# EAGLE board Audio-Sound_Breakout-Panel-v10 (EAGLE 7.4.0), part 1 of 2
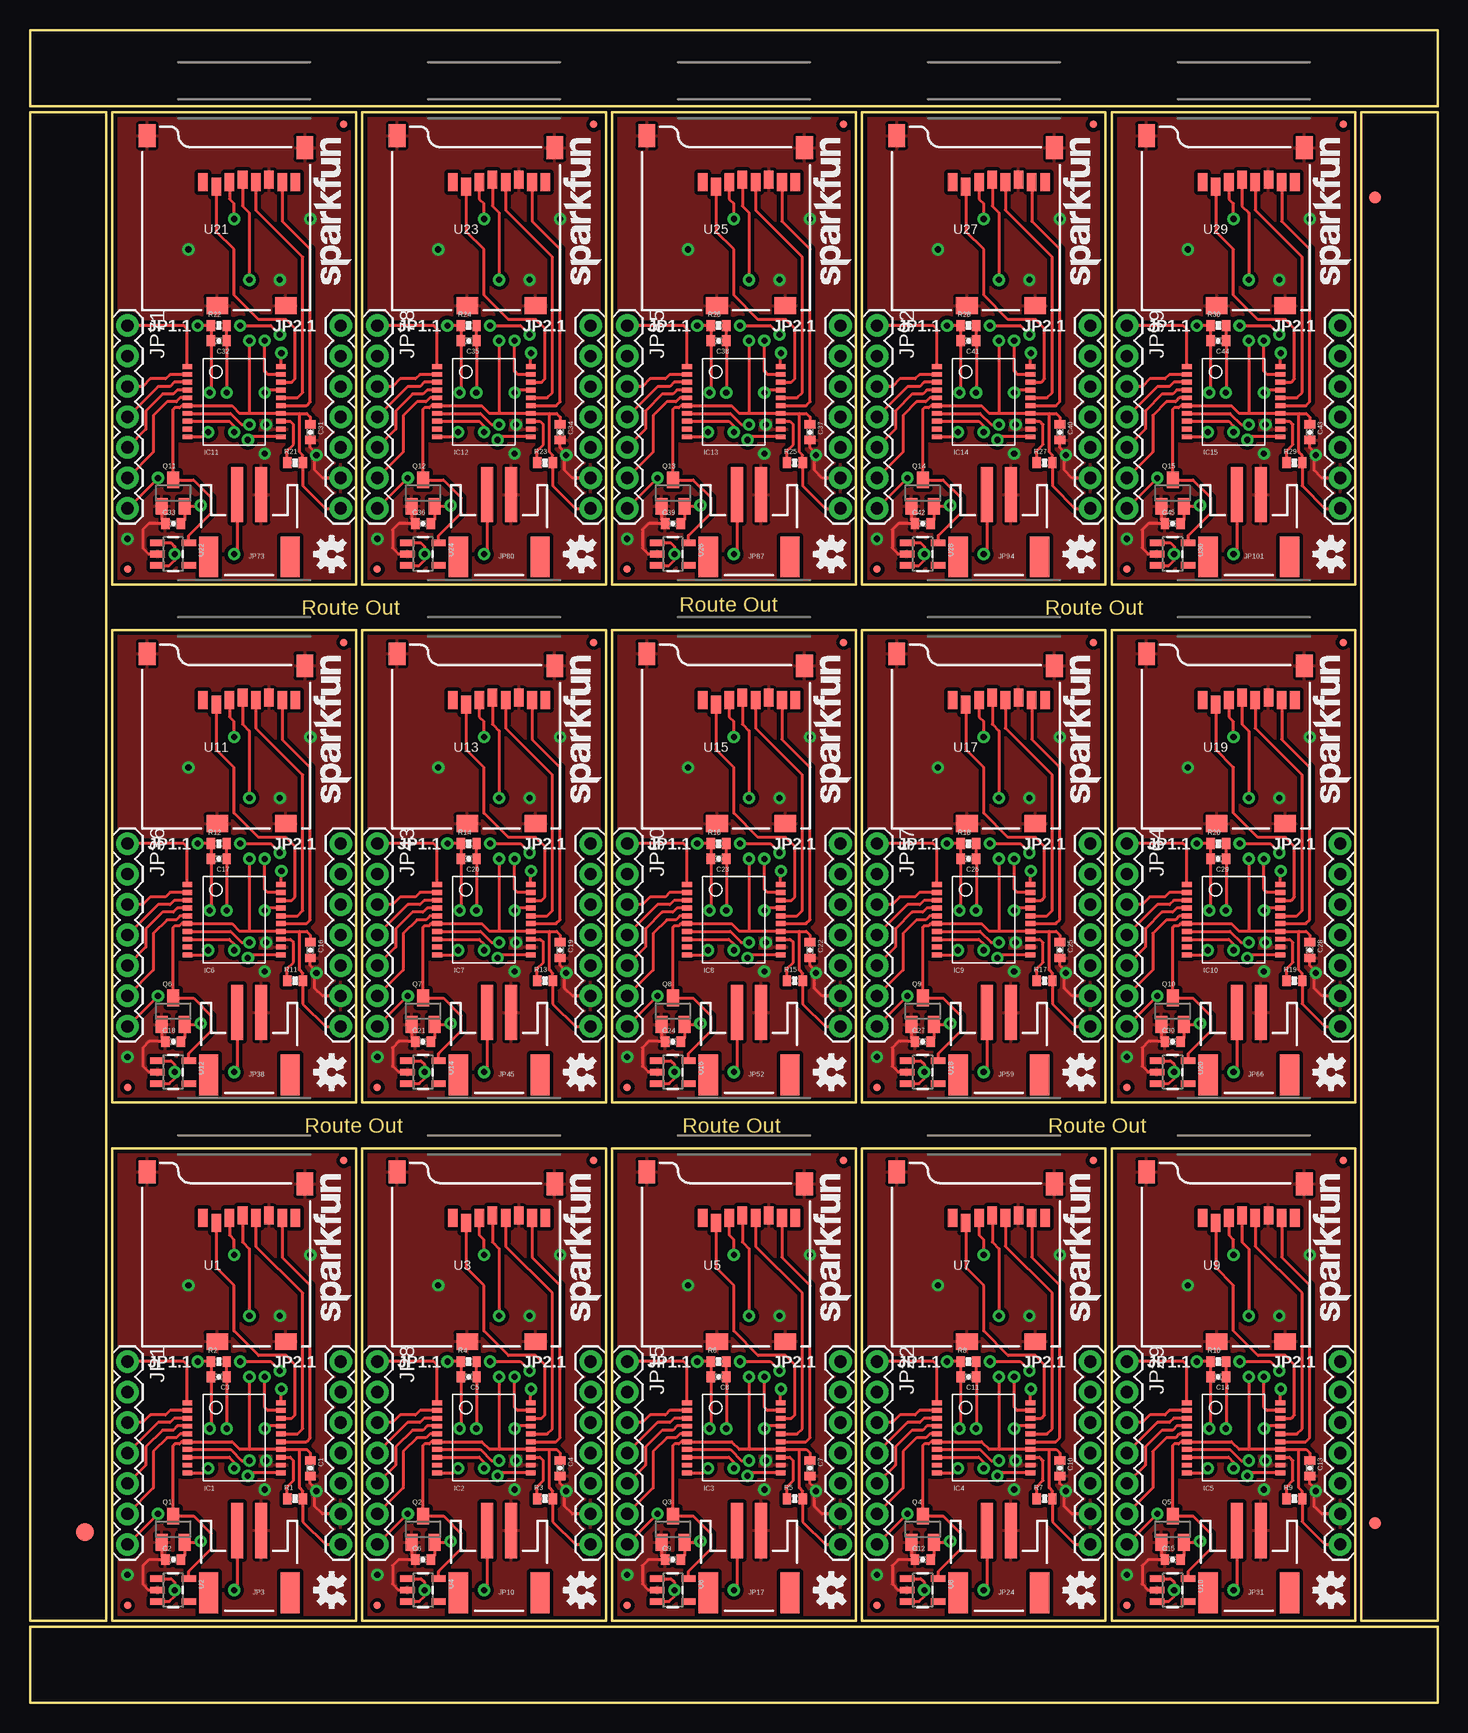
[diagram p0: board, top side]
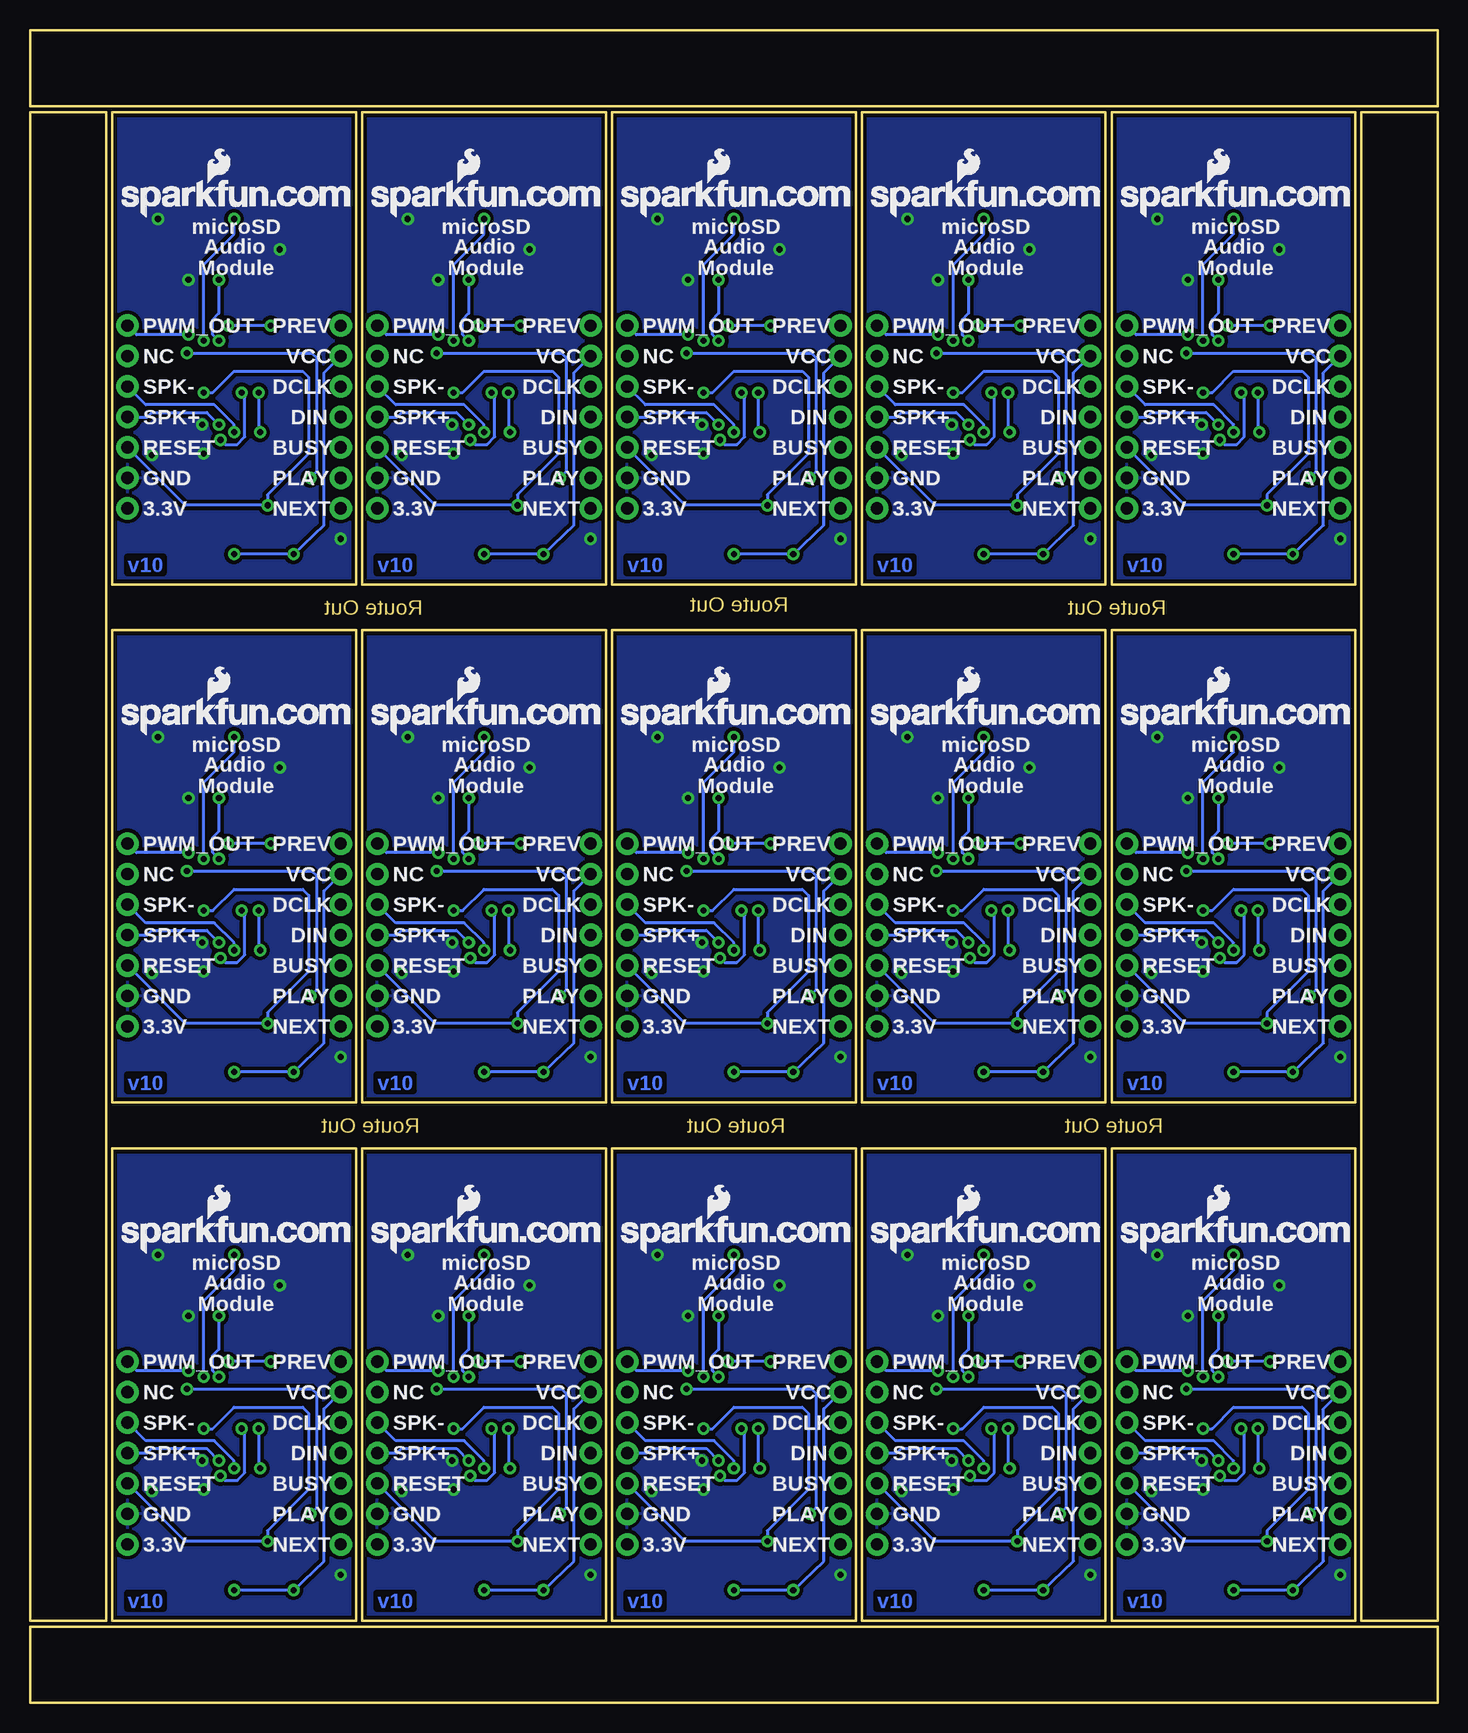
[diagram p1: board, bottom side, seen from below]

Size 117.35 x 139.45 mm. Coordinates in mm from the lower left corner, seen from the top.
Outline: 6.35,79.25 6.35,6.86 0,6.86 0,29.72
Outline: 0,27.18 0,132.59 6.35,132.59 6.35,76.71
Outline: 79.25,0 0,0 0,6.35 29.72,6.35
Outline: 27.18,6.35 117.35,6.35 117.35,0 76.71,0
Outline: 38.1,139.45 117.35,139.45 117.35,133.1 87.63,133.1
Outline: 90.17,133.1 0,133.1 0,139.45 40.64,139.45
Outline: 111,60.2 111,132.59 117.35,132.59 117.35,109.73
Outline: 117.35,112.27 117.35,6.86 111,6.86 111,62.74
Outline: 6.86,6.86 27.18,6.86 27.18,46.23 6.86,46.23 6.86,6.86
Outline: 27.69,6.86 48.01,6.86 48.01,46.23 27.69,46.23 27.69,6.86
Outline: 48.51,6.86 68.83,6.86 68.83,46.23 48.51,46.23 48.51,6.86
Outline: 69.34,6.86 89.66,6.86 89.66,46.23 69.34,46.23 69.34,6.86
Outline: 90.17,6.86 110.49,6.86 110.49,46.23 90.17,46.23 90.17,6.86
Outline: 6.86,50.04 27.18,50.04 27.18,89.41 6.86,89.41 6.86,50.04
Outline: 27.69,50.04 48.01,50.04 48.01,89.41 27.69,89.41 27.69,50.04
Outline: 48.51,50.04 68.83,50.04 68.83,89.41 48.51,89.41 48.51,50.04
Outline: 69.34,50.04 89.66,50.04 89.66,89.41 69.34,89.41 69.34,50.04
Outline: 90.17,50.04 110.49,50.04 110.49,89.41 90.17,89.41 90.17,50.04
Outline: 6.86,93.22 27.18,93.22 27.18,132.59 6.86,132.59 6.86,93.22
Outline: 27.69,93.22 48.01,93.22 48.01,132.59 27.69,132.59 27.69,93.22
Outline: 48.51,93.22 68.83,93.22 68.83,132.59 48.51,132.59 48.51,93.22
Outline: 69.34,93.22 89.66,93.22 89.66,132.59 69.34,132.59 69.34,93.22
Outline: 90.17,93.22 110.49,93.22 110.49,132.59 90.17,132.59 90.17,93.22
Copper layers (1*16): Top 0.035mm / dielectric 1.5mm / Bottom 0.035mm
Design rules "default": minimum track width 8mil, minimum drill 20mil, track to track 8mil, track to pad 8mil, pad to pad 8mil, via to via 8mil, smd to smd 8mil, copper to edge 8mil, drill to drill 8mil, minimum pad ring 12mil, minimum via ring 10mil, stop-mask expansion 4mil, vias tented up to drill 20mil, thermal gap 10mil

## Footprints (pad centres in the part's own frame; a part is rotated, then mirrored left to right if it is on the bottom)
0402-CAP = smd 0.7 x 0.9: 1 -0.65,0; 2 0.65,0
FIDUCIAL-1.5X3 = smd 1.5 x 1.5: 1 0,0
FIDUCIAL-1X2 = smd 1 x 1: 1 0,0
SSOP_20 = smd 0.813 x 0.406: 1 -3.9,2.925; 2 -3.9,2.275; 3 -3.9,1.625; 4 -3.9,0.975; 5 -3.9,0.325; 6 -3.9,-0.325; 7 -3.9,-0.975; 8 -3.9,-1.625; 9 -3.9,-2.275; 10 -3.9,-2.925; 11 3.9,-2.925; 12 3.9,-2.275; 13 3.9,-1.625; 14 3.9,-0.975; 15 3.9,-0.325; 16 3.9,0.325; 17 3.9,0.975; 18 3.9,1.625; 19 3.9,2.275; 20 3.9,2.925
1X07 = drill 1.016 pad 1.88: 1 0,0; 2 2.54,0; 3 5.08,0; 4 7.62,0; 5 10.16,0; 6 12.7,0; 7 15.24,0
JST-2-SMD = smd 1 x 4.6: 1 -1,-3.7; 2 1,-3.7 | smd 1.6 x 3.4: NC1 -3.4,1.5; NC2 3.4,1.5
MICRO-FIDUCIAL = smd 0.635 x 0.635: 1 0,0
SOT23 = smd 1 x 1.4: 1 -0.95,-1.1; 2 0.95,-1.1; 3 0,1.1
0402-RES = smd 0.7 x 0.9: 1 -0.65,0; 2 0.65,0
MICRO-SD-SOCKET-PP = smd 0.8 x 1.5: 1 -8.94,10.7; 2 -7.84,10.3; 3 -6.74,10.7; 4 -5.64,10.9; 5 -4.54,10.7; 6 -3.44,10.9; 7 -2.34,10.7; 8 -1.24,10.7 | smd 1.8 x 1.4: CD1 -2.05,0.4; CD2 -7.75,0.4 | smd 1.4 x 1.9: GND1 -13.6,14.55; GND3 -0.45,13.55
SOT23-5 = smd 0.55 x 1.2: 1 -0.95,-1.3; 2 0,-1.3; 3 0.95,-1.3; 4 0.95,1.3; 5 -0.95,1.3

## Placement (x,y rotation side)
C1  100nF  [0402-CAP]  23.37,19.56 270 top
C2  100nF  [0402-CAP]  11.94,11.94 0 top
C3  1nF  [0402-CAP]  15.75,27.18 180 top
C4  100nF  [0402-CAP]  44.2,19.56 270 top
C5  1nF  [0402-CAP]  36.58,27.18 180 top
C6  100nF  [0402-CAP]  32.77,11.94 0 top
C7  100nF  [0402-CAP]  65.02,19.56 270 top
C8  1nF  [0402-CAP]  57.4,27.18 180 top
C9  100nF  [0402-CAP]  53.59,11.94 0 top
C10  100nF  [0402-CAP]  85.85,19.56 270 top
C11  1nF  [0402-CAP]  78.23,27.18 180 top
C12  100nF  [0402-CAP]  74.42,11.94 0 top
C13  100nF  [0402-CAP]  106.68,19.56 270 top
C14  1nF  [0402-CAP]  99.06,27.18 180 top
C15  100nF  [0402-CAP]  95.25,11.94 0 top
C16  100nF  [0402-CAP]  23.37,62.74 270 top
C17  1nF  [0402-CAP]  15.75,70.36 180 top
C18  100nF  [0402-CAP]  11.94,55.12 0 top
C19  100nF  [0402-CAP]  44.2,62.74 270 top
C20  1nF  [0402-CAP]  36.58,70.36 180 top
C21  100nF  [0402-CAP]  32.77,55.12 0 top
C22  100nF  [0402-CAP]  65.02,62.74 270 top
C23  1nF  [0402-CAP]  57.4,70.36 180 top
C24  100nF  [0402-CAP]  53.59,55.12 0 top
C25  100nF  [0402-CAP]  85.85,62.74 270 top
C26  1nF  [0402-CAP]  78.23,70.36 180 top
C27  100nF  [0402-CAP]  74.42,55.12 0 top
C28  100nF  [0402-CAP]  106.68,62.74 270 top
C29  1nF  [0402-CAP]  99.06,70.36 180 top
C30  100nF  [0402-CAP]  95.25,55.12 0 top
C31  100nF  [0402-CAP]  23.37,105.92 270 top
C32  1nF  [0402-CAP]  15.75,113.54 180 top
C33  100nF  [0402-CAP]  11.94,98.3 0 top
C34  100nF  [0402-CAP]  44.2,105.92 270 top
C35  1nF  [0402-CAP]  36.58,113.54 180 top
C36  100nF  [0402-CAP]  32.77,98.3 0 top
C37  100nF  [0402-CAP]  65.02,105.92 270 top
C38  1nF  [0402-CAP]  57.4,113.54 180 top
C39  100nF  [0402-CAP]  53.59,98.3 0 top
C40  100nF  [0402-CAP]  85.85,105.92 270 top
C41  1nF  [0402-CAP]  78.23,113.54 180 top
C42  100nF  [0402-CAP]  74.42,98.3 0 top
C43  100nF  [0402-CAP]  106.68,105.92 270 top
C44  1nF  [0402-CAP]  99.06,113.54 180 top
C45  100nF  [0402-CAP]  95.25,98.3 0 top
E$1  [FIDUCIAL-1.5X3]  4.57,14.22 0 top
E$7  [FIDUCIAL-1X2]  112.14,125.48 180 top
E$8  [FIDUCIAL-1X2]  112.14,14.99 0 top
IC1  WTV020SD-20S  [SSOP_20]  17.02,22.1 0 top
IC2  WTV020SD-20S  [SSOP_20]  37.85,22.1 0 top
IC3  WTV020SD-20S  [SSOP_20]  58.67,22.1 0 top
IC4  WTV020SD-20S  [SSOP_20]  79.5,22.1 0 top
IC5  WTV020SD-20S  [SSOP_20]  100.33,22.1 0 top
IC6  WTV020SD-20S  [SSOP_20]  17.02,65.28 0 top
IC7  WTV020SD-20S  [SSOP_20]  37.85,65.28 0 top
IC8  WTV020SD-20S  [SSOP_20]  58.67,65.28 0 top
IC9  WTV020SD-20S  [SSOP_20]  79.5,65.28 0 top
IC10  WTV020SD-20S  [SSOP_20]  100.33,65.28 0 top
IC11  WTV020SD-20S  [SSOP_20]  17.02,108.46 0 top
IC12  WTV020SD-20S  [SSOP_20]  37.85,108.46 0 top
IC13  WTV020SD-20S  [SSOP_20]  58.67,108.46 0 top
IC14  WTV020SD-20S  [SSOP_20]  79.5,108.46 0 top
IC15  WTV020SD-20S  [SSOP_20]  100.33,108.46 0 top
JP1  [1X07]  8.13,28.45 270 top
JP2  [1X07]  25.91,28.45 270 top
JP3  [JST-2-SMD]  18.29,10.67 180 top
JP4  LOGO-SFENW2  [SFE-NEW-WEB]  26.8,31.88 90 top
JP5  LOGO-SFENEW  [SFE-NEW-WEBLOGO]  26.42,37.47 0 bottom
JP6  FIDUCIALUFIDUCIAL  [MICRO-FIDUCIAL]  8.13,8.13 0 top
JP7  FIDUCIALUFIDUCIAL  [MICRO-FIDUCIAL]  26.16,45.21 0 top
JP8  [1X07]  28.96,28.45 270 top
JP9  [1X07]  46.74,28.45 270 top
JP10  [JST-2-SMD]  39.12,10.67 180 top
JP11  LOGO-SFENW2  [SFE-NEW-WEB]  47.62,31.88 90 top
JP12  LOGO-SFENEW  [SFE-NEW-WEBLOGO]  47.24,37.47 0 bottom
JP13  FIDUCIALUFIDUCIAL  [MICRO-FIDUCIAL]  28.96,8.13 0 top
JP14  FIDUCIALUFIDUCIAL  [MICRO-FIDUCIAL]  46.99,45.21 0 top
JP15  [1X07]  49.78,28.45 270 top
JP16  [1X07]  67.56,28.45 270 top
JP17  [JST-2-SMD]  59.94,10.67 180 top
JP18  LOGO-SFENW2  [SFE-NEW-WEB]  68.45,31.88 90 top
JP19  LOGO-SFENEW  [SFE-NEW-WEBLOGO]  68.07,37.47 0 bottom
JP20  FIDUCIALUFIDUCIAL  [MICRO-FIDUCIAL]  49.78,8.13 0 top
JP21  FIDUCIALUFIDUCIAL  [MICRO-FIDUCIAL]  67.82,45.21 0 top
JP22  [1X07]  70.61,28.45 270 top
JP23  [1X07]  88.39,28.45 270 top
JP24  [JST-2-SMD]  80.77,10.67 180 top
JP25  LOGO-SFENW2  [SFE-NEW-WEB]  89.28,31.88 90 top
JP26  LOGO-SFENEW  [SFE-NEW-WEBLOGO]  88.9,37.47 0 bottom
JP27  FIDUCIALUFIDUCIAL  [MICRO-FIDUCIAL]  70.61,8.13 0 top
JP28  FIDUCIALUFIDUCIAL  [MICRO-FIDUCIAL]  88.65,45.21 0 top
JP29  [1X07]  91.44,28.45 270 top
JP30  [1X07]  109.22,28.45 270 top
JP31  [JST-2-SMD]  101.6,10.67 180 top
JP32  LOGO-SFENW2  [SFE-NEW-WEB]  110.11,31.88 90 top
JP33  LOGO-SFENEW  [SFE-NEW-WEBLOGO]  109.73,37.47 0 bottom
JP34  FIDUCIALUFIDUCIAL  [MICRO-FIDUCIAL]  91.44,8.13 0 top
JP35  FIDUCIALUFIDUCIAL  [MICRO-FIDUCIAL]  109.47,45.21 0 top
JP36  [1X07]  8.13,71.63 270 top
JP37  [1X07]  25.91,71.63 270 top
JP38  [JST-2-SMD]  18.29,53.85 180 top
JP39  LOGO-SFENW2  [SFE-NEW-WEB]  26.8,75.06 90 top
JP40  LOGO-SFENEW  [SFE-NEW-WEBLOGO]  26.42,80.64 0 bottom
JP41  FIDUCIALUFIDUCIAL  [MICRO-FIDUCIAL]  8.13,51.31 0 top
JP42  FIDUCIALUFIDUCIAL  [MICRO-FIDUCIAL]  26.16,88.39 0 top
JP43  [1X07]  28.96,71.63 270 top
JP44  [1X07]  46.74,71.63 270 top
JP45  [JST-2-SMD]  39.12,53.85 180 top
JP46  LOGO-SFENW2  [SFE-NEW-WEB]  47.62,75.06 90 top
JP47  LOGO-SFENEW  [SFE-NEW-WEBLOGO]  47.24,80.64 0 bottom
JP48  FIDUCIALUFIDUCIAL  [MICRO-FIDUCIAL]  28.96,51.31 0 top
JP49  FIDUCIALUFIDUCIAL  [MICRO-FIDUCIAL]  46.99,88.39 0 top
JP50  [1X07]  49.78,71.63 270 top
JP51  [1X07]  67.56,71.63 270 top
JP52  [JST-2-SMD]  59.94,53.85 180 top
JP53  LOGO-SFENW2  [SFE-NEW-WEB]  68.45,75.06 90 top
JP54  LOGO-SFENEW  [SFE-NEW-WEBLOGO]  68.07,80.64 0 bottom
JP55  FIDUCIALUFIDUCIAL  [MICRO-FIDUCIAL]  49.78,51.31 0 top
JP56  FIDUCIALUFIDUCIAL  [MICRO-FIDUCIAL]  67.82,88.39 0 top
JP57  [1X07]  70.61,71.63 270 top
JP58  [1X07]  88.39,71.63 270 top
JP59  [JST-2-SMD]  80.77,53.85 180 top
JP60  LOGO-SFENW2  [SFE-NEW-WEB]  89.28,75.06 90 top
JP61  LOGO-SFENEW  [SFE-NEW-WEBLOGO]  88.9,80.64 0 bottom
JP62  FIDUCIALUFIDUCIAL  [MICRO-FIDUCIAL]  70.61,51.31 0 top
JP63  FIDUCIALUFIDUCIAL  [MICRO-FIDUCIAL]  88.65,88.39 0 top
JP64  [1X07]  91.44,71.63 270 top
JP65  [1X07]  109.22,71.63 270 top
JP66  [JST-2-SMD]  101.6,53.85 180 top
JP67  LOGO-SFENW2  [SFE-NEW-WEB]  110.11,75.06 90 top
JP68  LOGO-SFENEW  [SFE-NEW-WEBLOGO]  109.73,80.64 0 bottom
JP69  FIDUCIALUFIDUCIAL  [MICRO-FIDUCIAL]  91.44,51.31 0 top
JP70  FIDUCIALUFIDUCIAL  [MICRO-FIDUCIAL]  109.47,88.39 0 top
JP71  [1X07]  8.13,114.81 270 top
JP72  [1X07]  25.91,114.81 270 top
JP73  [JST-2-SMD]  18.29,97.03 180 top
JP74  LOGO-SFENW2  [SFE-NEW-WEB]  26.8,118.24 90 top
JP75  LOGO-SFENEW  [SFE-NEW-WEBLOGO]  26.42,123.83 0 bottom
JP76  FIDUCIALUFIDUCIAL  [MICRO-FIDUCIAL]  8.13,94.49 0 top
JP77  FIDUCIALUFIDUCIAL  [MICRO-FIDUCIAL]  26.16,131.57 0 top
JP78  [1X07]  28.96,114.81 270 top
JP79  [1X07]  46.74,114.81 270 top
JP80  [JST-2-SMD]  39.12,97.03 180 top
JP81  LOGO-SFENW2  [SFE-NEW-WEB]  47.62,118.24 90 top
JP82  LOGO-SFENEW  [SFE-NEW-WEBLOGO]  47.24,123.83 0 bottom
JP83  FIDUCIALUFIDUCIAL  [MICRO-FIDUCIAL]  28.96,94.49 0 top
JP84  FIDUCIALUFIDUCIAL  [MICRO-FIDUCIAL]  46.99,131.57 0 top
JP85  [1X07]  49.78,114.81 270 top
JP86  [1X07]  67.56,114.81 270 top
JP87  [JST-2-SMD]  59.94,97.03 180 top
JP88  LOGO-SFENW2  [SFE-NEW-WEB]  68.45,118.24 90 top
JP89  LOGO-SFENEW  [SFE-NEW-WEBLOGO]  68.07,123.83 0 bottom
JP90  FIDUCIALUFIDUCIAL  [MICRO-FIDUCIAL]  49.78,94.49 0 top
JP91  FIDUCIALUFIDUCIAL  [MICRO-FIDUCIAL]  67.82,131.57 0 top
JP92  [1X07]  70.61,114.81 270 top
JP93  [1X07]  88.39,114.81 270 top
JP94  [JST-2-SMD]  80.77,97.03 180 top
JP95  LOGO-SFENW2  [SFE-NEW-WEB]  89.28,118.24 90 top
JP96  LOGO-SFENEW  [SFE-NEW-WEBLOGO]  88.9,123.83 0 bottom
JP97  FIDUCIALUFIDUCIAL  [MICRO-FIDUCIAL]  70.61,94.49 0 top
JP98  FIDUCIALUFIDUCIAL  [MICRO-FIDUCIAL]  88.65,131.57 0 top
JP99  [1X07]  91.44,114.81 270 top
JP100  [1X07]  109.22,114.81 270 top
JP101  [JST-2-SMD]  101.6,97.03 180 top
JP102  LOGO-SFENW2  [SFE-NEW-WEB]  110.11,118.24 90 top
JP103  LOGO-SFENEW  [SFE-NEW-WEBLOGO]  109.73,123.83 0 bottom
JP104  FIDUCIALUFIDUCIAL  [MICRO-FIDUCIAL]  91.44,94.49 0 top
JP105  FIDUCIALUFIDUCIAL  [MICRO-FIDUCIAL]  109.47,131.57 0 top
Q1  MMBT2222A  [SOT23]  11.94,14.48 0 top
Q2  MMBT2222A  [SOT23]  32.77,14.48 0 top
Q3  MMBT2222A  [SOT23]  53.59,14.48 0 top
Q4  MMBT2222A  [SOT23]  74.42,14.48 0 top
Q5  MMBT2222A  [SOT23]  95.25,14.48 0 top
Q6  MMBT2222A  [SOT23]  11.94,57.66 0 top
Q7  MMBT2222A  [SOT23]  32.77,57.66 0 top
Q8  MMBT2222A  [SOT23]  53.59,57.66 0 top
Q9  MMBT2222A  [SOT23]  74.42,57.66 0 top
Q10  MMBT2222A  [SOT23]  95.25,57.66 0 top
Q11  MMBT2222A  [SOT23]  11.94,100.84 0 top
Q12  MMBT2222A  [SOT23]  32.77,100.84 0 top
Q13  MMBT2222A  [SOT23]  53.59,100.84 0 top
Q14  MMBT2222A  [SOT23]  74.42,100.84 0 top
Q15  MMBT2222A  [SOT23]  95.25,100.84 0 top
R1  150  [0402-RES]  22.1,17.02 0 top
R2  15k  [0402-RES]  15.75,28.45 0 top
R3  150  [0402-RES]  42.93,17.02 0 top
R4  15k  [0402-RES]  36.58,28.45 0 top
R5  150  [0402-RES]  63.75,17.02 0 top
R6  15k  [0402-RES]  57.4,28.45 0 top
R7  150  [0402-RES]  84.58,17.02 0 top
R8  15k  [0402-RES]  78.23,28.45 0 top
R9  150  [0402-RES]  105.41,17.02 0 top
R10  15k  [0402-RES]  99.06,28.45 0 top
R11  150  [0402-RES]  22.1,60.2 0 top
R12  15k  [0402-RES]  15.75,71.63 0 top
R13  150  [0402-RES]  42.93,60.2 0 top
R14  15k  [0402-RES]  36.58,71.63 0 top
R15  150  [0402-RES]  63.75,60.2 0 top
R16  15k  [0402-RES]  57.4,71.63 0 top
R17  150  [0402-RES]  84.58,60.2 0 top
R18  15k  [0402-RES]  78.23,71.63 0 top
R19  150  [0402-RES]  105.41,60.2 0 top
R20  15k  [0402-RES]  99.06,71.63 0 top
R21  150  [0402-RES]  22.1,103.38 0 top
R22  15k  [0402-RES]  15.75,114.81 0 top
R23  150  [0402-RES]  42.93,103.38 0 top
R24  15k  [0402-RES]  36.58,114.81 0 top
R25  150  [0402-RES]  63.75,103.38 0 top
R26  15k  [0402-RES]  57.4,114.81 0 top
R27  150  [0402-RES]  84.58,103.38 0 top
R28  15k  [0402-RES]  78.23,114.81 0 top
R29  150  [0402-RES]  105.41,103.38 0 top
R30  15k  [0402-RES]  99.06,114.81 0 top
U1  microSD socket  [MICRO-SD-SOCKET-PP]  23.37,29.72 0 top
U2  MIC5219-3.3YM5  [SOT23-5]  11.94,9.4 270 top
U3  microSD socket  [MICRO-SD-SOCKET-PP]  44.2,29.72 0 top
U4  MIC5219-3.3YM5  [SOT23-5]  32.77,9.4 270 top
U5  microSD socket  [MICRO-SD-SOCKET-PP]  65.02,29.72 0 top
U6  MIC5219-3.3YM5  [SOT23-5]  53.59,9.4 270 top
U7  microSD socket  [MICRO-SD-SOCKET-PP]  85.85,29.72 0 top
U8  MIC5219-3.3YM5  [SOT23-5]  74.42,9.4 270 top
U9  microSD socket  [MICRO-SD-SOCKET-PP]  106.68,29.72 0 top
U10  MIC5219-3.3YM5  [SOT23-5]  95.25,9.4 270 top
U11  microSD socket  [MICRO-SD-SOCKET-PP]  23.37,72.9 0 top
U12  MIC5219-3.3YM5  [SOT23-5]  11.94,52.58 270 top
U13  microSD socket  [MICRO-SD-SOCKET-PP]  44.2,72.9 0 top
U14  MIC5219-3.3YM5  [SOT23-5]  32.77,52.58 270 top
U15  microSD socket  [MICRO-SD-SOCKET-PP]  65.02,72.9 0 top
U16  MIC5219-3.3YM5  [SOT23-5]  53.59,52.58 270 top
U17  microSD socket  [MICRO-SD-SOCKET-PP]  85.85,72.9 0 top
U18  MIC5219-3.3YM5  [SOT23-5]  74.42,52.58 270 top
U19  microSD socket  [MICRO-SD-SOCKET-PP]  106.68,72.9 0 top
U20  MIC5219-3.3YM5  [SOT23-5]  95.25,52.58 270 top
U21  microSD socket  [MICRO-SD-SOCKET-PP]  23.37,116.08 0 top
U22  MIC5219-3.3YM5  [SOT23-5]  11.94,95.76 270 top
U23  microSD socket  [MICRO-SD-SOCKET-PP]  44.2,116.08 0 top
U24  MIC5219-3.3YM5  [SOT23-5]  32.77,95.76 270 top
U25  microSD socket  [MICRO-SD-SOCKET-PP]  65.02,116.08 0 top
U26  MIC5219-3.3YM5  [SOT23-5]  53.59,95.76 270 top
U27  microSD socket  [MICRO-SD-SOCKET-PP]  85.85,116.08 0 top
U28  MIC5219-3.3YM5  [SOT23-5]  74.42,95.76 270 top
U29  microSD socket  [MICRO-SD-SOCKET-PP]  106.68,116.08 0 top
U30  MIC5219-3.3YM5  [SOT23-5]  95.25,95.76 270 top
U$1  OSHW-LOGOS  [OSHW-LOGO-S]  25.15,9.4 90 top
U$2  OSHW-LOGOS  [OSHW-LOGO-S]  45.97,9.4 90 top
U$3  OSHW-LOGOS  [OSHW-LOGO-S]  66.8,9.4 90 top
U$4  OSHW-LOGOS  [OSHW-LOGO-S]  87.63,9.4 90 top
U$5  OSHW-LOGOS  [OSHW-LOGO-S]  108.46,9.4 90 top
U$6  OSHW-LOGOS  [OSHW-LOGO-S]  25.15,52.58 90 top
U$7  OSHW-LOGOS  [OSHW-LOGO-S]  45.97,52.58 90 top
U$8  OSHW-LOGOS  [OSHW-LOGO-S]  66.8,52.58 90 top
U$9  OSHW-LOGOS  [OSHW-LOGO-S]  87.63,52.58 90 top
U$10  OSHW-LOGOS  [OSHW-LOGO-S]  108.46,52.58 90 top
U$11  OSHW-LOGOS  [OSHW-LOGO-S]  25.15,95.76 90 top
U$12  OSHW-LOGOS  [OSHW-LOGO-S]  45.97,95.76 90 top
U$13  OSHW-LOGOS  [OSHW-LOGO-S]  66.8,95.76 90 top
U$14  OSHW-LOGOS  [OSHW-LOGO-S]  87.63,95.76 90 top
U$15  OSHW-LOGOS  [OSHW-LOGO-S]  108.46,95.76 90 top

## Library data of the parts
C1 C4 C7 C10 C13 C16 C19 C22 C25 C28 C31 C34 C37 C40 C43 = SparkFun-Passives; PROD_ID: CAP-00810
C2 C6 C9 C12 C15 C18 C21 C24 C27 C30 C33 C36 C39 C42 C45 = SparkFun-Passives; MFG: Multiple; PROD_#: CAP-00810; SKU: NA; SPARKLE_ID: 918
C3 C5 C8 C11 C14 C17 C20 C23 C26 C29 C32 C35 C38 C41 C44 = SparkFun-Passives; PROD_ID: CAP-07886
E$1 = SparkFun-Retired
E$7 E$8 JP4 JP5 JP11 JP12 JP18 JP19 JP25 JP26 JP32 JP33 JP39 JP40 JP46 JP47 JP53 JP54 JP60 JP61 JP67 JP68 JP74 JP75 JP81 JP82 JP88 JP89 JP95 JP96 JP102 JP103 U$1-U$15 = SparkFun-Aesthetics
IC1-IC15 = SparkFun-DigitalIC; PROD_#: NA; PROD_ID: IC-11012; SKU: NA; SPARKLE_ID: 6000
JP1 JP2 JP8 JP9 JP15 JP16 JP22 JP23 JP29 JP30 JP36 JP37 JP43 JP44 JP50 JP51 JP57 JP58 JP64 JP65 JP71 JP72 JP78 JP79 JP85 JP86 JP92 JP93 JP99 JP100 = SparkFun-Connectors
JP3 JP10 JP17 JP24 JP31 JP38 JP45 JP52 JP59 JP66 JP73 JP80 JP87 JP94 JP101 = SparkFun-Connectors; PROD_ID: CONN-08352
JP6 JP7 JP13 JP14 JP20 JP21 JP27 JP28 JP34 JP35 JP41 JP42 JP48 JP49 JP55 JP56 JP62 JP63 JP69 JP70 JP76 JP77 JP83 JP84 JP90 JP91 JP97 JP98 JP104 JP105 = SparkFun
Q1-Q15 = SparkFun-DiscreteSemi; PROD_ID: TRANS-08049
R1 R3 R5 R7 R9 R11 R13 R15 R17 R19 R21 R23 R25 R27 R29 = SparkFun-Passives; PROD_ID: RES-11028
R2 R4 R6 R8 R10 R12 R14 R16 R18 R20 R22 R24 R26 R28 R30 = SparkFun-Passives; PROD_ID: RES-07854
U1 U3 U5 U7 U9 U11 U13 U15 U17 U19 U21 U23 U25 U27 U29 = SparkFun-Connectors; PROD_ID: CONN-07820
U2 U4 U6 U8 U10 U12 U14 U16 U18 U20 U22 U24 U26 U28 U30 = SparkFun-PowerIC; PROD_ID: VREG-09872

## Nets
3.3V: C1.1 IC1.6 IC1.14 JP2.7 Q1.3 R1.2 U1.4 U2.5
3.3V1: C4.1 IC2.6 IC2.14 JP9.7 Q2.3 R3.2 U3.4 U4.5
3.3V2: C7.1 IC3.6 IC3.14 JP16.7 Q3.3 R5.2 U5.4 U6.5
3.3V3: C10.1 IC4.6 IC4.14 JP23.7 Q4.3 R7.2 U7.4 U8.5
3.3V4: C13.1 IC5.6 IC5.14 JP30.7 Q5.3 R9.2 U9.4 U10.5
3.3V5: C16.1 IC6.6 IC6.14 JP37.7 Q6.3 R11.2 U11.4 U12.5
3.3V6: C19.1 IC7.6 IC7.14 JP44.7 Q7.3 R13.2 U13.4 U14.5
3.3V7: C22.1 IC8.6 IC8.14 JP51.7 Q8.3 R15.2 U15.4 U16.5
3.3V8: C25.1 IC9.6 IC9.14 JP58.7 Q9.3 R17.2 U17.4 U18.5
3.3V9: C28.1 IC10.6 IC10.14 JP65.7 Q10.3 R19.2 U19.4 U20.5
3.3V10: C31.1 IC11.6 IC11.14 JP72.7 Q11.3 R21.2 U21.4 U22.5
3.3V11: C34.1 IC12.6 IC12.14 JP79.7 Q12.3 R23.2 U23.4 U24.5
3.3V12: C37.1 IC13.6 IC13.14 JP86.7 Q13.3 R25.2 U25.4 U26.5
3.3V13: C40.1 IC14.6 IC14.14 JP93.7 Q14.3 R27.2 U27.4 U28.5
3.3V14: C43.1 IC15.6 IC15.14 JP100.7 Q15.3 R29.2 U29.4 U30.5
BUSY: IC1.4 JP1.5
BUSY1: IC2.4 JP8.5
BUSY2: IC3.4 JP15.5
BUSY3: IC4.4 JP22.5
BUSY4: IC5.4 JP29.5
BUSY5: IC6.4 JP36.5
BUSY6: IC7.4 JP43.5
BUSY7: IC8.4 JP50.5
BUSY8: IC9.4 JP57.5
BUSY9: IC10.4 JP64.5
BUSY10: IC11.4 JP71.5
BUSY11: IC12.4 JP78.5
BUSY12: IC13.4 JP85.5
BUSY13: IC14.4 JP92.5
BUSY14: IC15.4 JP99.5
DCLK: IC1.2 JP1.3
DCLK1: IC2.2 JP8.3
DCLK2: IC3.2 JP15.3
DCLK3: IC4.2 JP22.3
DCLK4: IC5.2 JP29.3
DCLK5: IC6.2 JP36.3
DCLK6: IC7.2 JP43.3
DCLK7: IC8.2 JP50.3
DCLK8: IC9.2 JP57.3
DCLK9: IC10.2 JP64.3
DCLK10: IC11.2 JP71.3
DCLK11: IC12.2 JP78.3
DCLK12: IC13.2 JP85.3
DCLK13: IC14.2 JP92.3
DCLK14: IC15.2 JP99.3
DIN: IC1.3 JP1.4
DIN1: IC2.3 JP8.4
DIN2: IC3.3 JP15.4
DIN3: IC4.3 JP22.4
DIN4: IC5.3 JP29.4
DIN5: IC6.3 JP36.4
DIN6: IC7.3 JP43.4
DIN7: IC8.3 JP50.4
DIN8: IC9.3 JP57.4
DIN9: IC10.3 JP64.4
DIN10: IC11.3 JP71.4
DIN11: IC12.3 JP78.4
DIN12: IC13.3 JP85.4
DIN13: IC14.3 JP92.4
DIN14: IC15.3 JP99.4
GND: C1.2 C2.1 IC1.12 JP2.6 JP3.1 Q1.1 U1.6 U1.CD1 U1.CD2 U1.GND1 U1.GND3 U2.2
GND1: C4.2 C6.1 IC2.12 JP9.6 JP10.1 Q2.1 U3.6 U3.CD1 U3.CD2 U3.GND1 U3.GND3 U4.2
GND2: C7.2 C9.1 IC3.12 JP16.6 JP17.1 Q3.1 U5.6 U5.CD1 U5.CD2 U5.GND1 U5.GND3 U6.2
GND3: C10.2 C12.1 IC4.12 JP23.6 JP24.1 Q4.1 U7.6 U7.CD1 U7.CD2 U7.GND1 U7.GND3 U8.2
GND4: C13.2 C15.1 IC5.12 JP30.6 JP31.1 Q5.1 U9.6 U9.CD1 U9.CD2 U9.GND1 U9.GND3 U10.2
GND5: C16.2 C18.1 IC6.12 JP37.6 JP38.1 Q6.1 U11.6 U11.CD1 U11.CD2 U11.GND1 U11.GND3 U12.2
GND6: C19.2 C21.1 IC7.12 JP44.6 JP45.1 Q7.1 U13.6 U13.CD1 U13.CD2 U13.GND1 U13.GND3 U14.2
GND7: C22.2 C24.1 IC8.12 JP51.6 JP52.1 Q8.1 U15.6 U15.CD1 U15.CD2 U15.GND1 U15.GND3 U16.2
GND8: C25.2 C27.1 IC9.12 JP58.6 JP59.1 Q9.1 U17.6 U17.CD1 U17.CD2 U17.GND1 U17.GND3 U18.2
GND9: C28.2 C30.1 IC10.12 JP65.6 JP66.1 Q10.1 U19.6 U19.CD1 U19.CD2 U19.GND1 U19.GND3 U20.2
GND10: C31.2 C33.1 IC11.12 JP72.6 JP73.1 Q11.1 U21.6 U21.CD1 U21.CD2 U21.GND1 U21.GND3 U22.2
GND11: C34.2 C36.1 IC12.12 JP79.6 JP80.1 Q12.1 U23.6 U23.CD1 U23.CD2 U23.GND1 U23.GND3 U24.2
GND12: C37.2 C39.1 IC13.12 JP86.6 JP87.1 Q13.1 U25.6 U25.CD1 U25.CD2 U25.GND1 U25.GND3 U26.2
GND13: C40.2 C42.1 IC14.12 JP93.6 JP94.1 Q14.1 U27.6 U27.CD1 U27.CD2 U27.GND1 U27.GND3 U28.2
GND14: C43.2 C45.1 IC15.12 JP100.6 JP101.1 Q15.1 U29.6 U29.CD1 U29.CD2 U29.GND1 U29.GND3 U30.2
N$1: IC1.13 R1.1
N$2: C3.1 IC1.11 R2.2
N$3: IC2.13 R3.1
N$4: C5.1 IC2.11 R4.2
N$5: IC3.13 R5.1
N$6: C8.1 IC3.11 R6.2
N$7: IC4.13 R7.1
N$8: C11.1 IC4.11 R8.2
N$9: IC5.13 R9.1
N$10: C14.1 IC5.11 R10.2
N$11: IC6.13 R11.1
N$12: C17.1 IC6.11 R12.2
N$13: IC7.13 R13.1
N$14: C20.1 IC7.11 R14.2
N$15: IC8.13 R15.1
N$16: C23.1 IC8.11 R16.2
N$17: IC9.13 R17.1
N$18: C26.1 IC9.11 R18.2
N$19: IC10.13 R19.1
N$20: C29.1 IC10.11 R20.2
N$21: IC11.13 R21.1
N$22: C32.1 IC11.11 R22.2
N$23: IC12.13 R23.1
N$24: C35.1 IC12.11 R24.2
N$25: IC13.13 R25.1
N$26: C38.1 IC13.11 R26.2
N$27: IC14.13 R27.1
N$28: C41.1 IC14.11 R28.2
N$29: IC15.13 R29.1
N$30: C44.1 IC15.11 R30.2
NC: JP2.2
NC1: JP9.2
NC2: JP16.2
NC3: JP23.2
NC4: JP30.2
NC5: JP37.2
NC6: JP44.2
NC7: JP51.2
NC8: JP58.2
NC9: JP65.2
NC10: JP72.2
NC11: JP79.2
NC12: JP86.2
NC13: JP93.2
NC14: JP100.2
NEXT: IC1.20 JP1.7
NEXT1: IC2.20 JP8.7
NEXT2: IC3.20 JP15.7
NEXT3: IC4.20 JP22.7
NEXT4: IC5.20 JP29.7
NEXT5: IC6.20 JP36.7
NEXT6: IC7.20 JP43.7
NEXT7: IC8.20 JP50.7
NEXT8: IC9.20 JP57.7
NEXT9: IC10.20 JP64.7
NEXT10: IC11.20 JP71.7
NEXT11: IC12.20 JP78.7
NEXT12: IC13.20 JP85.7
NEXT13: IC14.20 JP92.7
NEXT14: IC15.20 JP99.7
PLAY: IC1.5 JP1.6
PLAY1: IC2.5 JP8.6
PLAY2: IC3.5 JP15.6
PLAY3: IC4.5 JP22.6
PLAY4: IC5.5 JP29.6
PLAY5: IC6.5 JP36.6
PLAY6: IC7.5 JP43.6
PLAY7: IC8.5 JP50.6
PLAY8: IC9.5 JP57.6
PLAY9: IC10.5 JP64.6
PLAY10: IC11.5 JP71.6
PLAY11: IC12.5 JP78.6
PLAY12: IC13.5 JP85.6
PLAY13: IC14.5 JP92.6
PLAY14: IC15.5 JP99.6
PREV: IC1.1 JP1.1
PREV1: IC2.1 JP8.1
PREV2: IC3.1 JP15.1
PREV3: IC4.1 JP22.1
PREV4: IC5.1 JP29.1
PREV5: IC6.1 JP36.1
PREV6: IC7.1 JP43.1
PREV7: IC8.1 JP50.1
PREV8: IC9.1 JP57.1
PREV9: IC10.1 JP64.1
PREV10: IC11.1 JP71.1
PREV11: IC12.1 JP78.1
PREV12: IC13.1 JP85.1
PREV13: IC14.1 JP92.1
PREV14: IC15.1 JP99.1
PWM: C3.2 IC1.10 JP2.1 R2.1
PWM1: C5.2 IC2.10 JP9.1 R4.1
PWM2: C8.2 IC3.10 JP16.1 R6.1
PWM3: C11.2 IC4.10 JP23.1 R8.1
PWM4: C14.2 IC5.10 JP30.1 R10.1
PWM5: C17.2 IC6.10 JP37.1 R12.1
PWM6: C20.2 IC7.10 JP44.1 R14.1
PWM7: C23.2 IC8.10 JP51.1 R16.1
PWM8: C26.2 IC9.10 JP58.1 R18.1
PWM9: C29.2 IC10.10 JP65.1 R20.1
PWM10: C32.2 IC11.10 JP72.1 R22.1
PWM11: C35.2 IC12.10 JP79.1 R24.1
PWM12: C38.2 IC13.10 JP86.1 R26.1
PWM13: C41.2 IC14.10 JP93.1 R28.1
PWM14: C44.2 IC15.10 JP100.1 R30.1
RESET: C2.2 IC1.17 JP2.5 Q1.2
RESET1: C6.2 IC2.17 JP9.5 Q2.2
RESET2: C9.2 IC3.17 JP16.5 Q3.2
RESET3: C12.2 IC4.17 JP23.5 Q4.2
RESET4: C15.2 IC5.17 JP30.5 Q5.2
RESET5: C18.2 IC6.17 JP37.5 Q6.2
RESET6: C21.2 IC7.17 JP44.5 Q7.2
RESET7: C24.2 IC8.17 JP51.5 Q8.2
RESET8: C27.2 IC9.17 JP58.5 Q9.2
RESET9: C30.2 IC10.17 JP65.5 Q10.2
RESET10: C33.2 IC11.17 JP72.5 Q11.2
RESET11: C36.2 IC12.17 JP79.5 Q12.2
RESET12: C39.2 IC13.17 JP86.5 Q13.2
RESET13: C42.2 IC14.17 JP93.5 Q14.2
RESET14: C45.2 IC15.17 JP100.5 Q15.2
SDCK: IC1.16 U1.5
SDCK1: IC2.16 U3.5
SDCK2: IC3.16 U5.5
SDCK3: IC4.16 U7.5
SDCK4: IC5.16 U9.5
SDCK5: IC6.16 U11.5
SDCK6: IC7.16 U13.5
SDCK7: IC8.16 U15.5
SDCK8: IC9.16 U17.5
SDCK9: IC10.16 U19.5
SDCK10: IC11.16 U21.5
SDCK11: IC12.16 U23.5
SDCK12: IC13.16 U25.5
SDCK13: IC14.16 U27.5
SDCK14: IC15.16 U29.5
SDCS: IC1.18 U1.2
SDCS1: IC2.18 U3.2
SDCS2: IC3.18 U5.2
SDCS3: IC4.18 U7.2
SDCS4: IC5.18 U9.2
SDCS5: IC6.18 U11.2
SDCS6: IC7.18 U13.2
SDCS7: IC8.18 U15.2
SDCS8: IC9.18 U17.2
SDCS9: IC10.18 U19.2
SDCS10: IC11.18 U21.2
SDCS11: IC12.18 U23.2
SDCS12: IC13.18 U25.2
SDCS13: IC14.18 U27.2
SDCS14: IC15.18 U29.2
SDDI: IC1.19 U1.3
SDDI1: IC2.19 U3.3
SDDI2: IC3.19 U5.3
SDDI3: IC4.19 U7.3
SDDI4: IC5.19 U9.3
SDDI5: IC6.19 U11.3
SDDI6: IC7.19 U13.3
SDDI7: IC8.19 U15.3
SDDI8: IC9.19 U17.3
SDDI9: IC10.19 U19.3
SDDI10: IC11.19 U21.3
SDDI11: IC12.19 U23.3
SDDI12: IC13.19 U25.3
SDDI13: IC14.19 U27.3
SDDI14: IC15.19 U29.3
SDDO: IC1.15 U1.7
SDDO1: IC2.15 U3.7
SDDO2: IC3.15 U5.7
SDDO3: IC4.15 U7.7
SDDO4: IC5.15 U9.7
SDDO5: IC6.15 U11.7
SDDO6: IC7.15 U13.7
SDDO7: IC8.15 U15.7
SDDO8: IC9.15 U17.7
SDDO9: IC10.15 U19.7
SDDO10: IC11.15 U21.7
SDDO11: IC12.15 U23.7
SDDO12: IC13.15 U25.7
SDDO13: IC14.15 U27.7
SDDO14: IC15.15 U29.7
SPK+: IC1.7 JP2.4
SPK+1: IC2.7 JP9.4
SPK+2: IC3.7 JP16.4
SPK+3: IC4.7 JP23.4
SPK+4: IC5.7 JP30.4
SPK+5: IC6.7 JP37.4
SPK+6: IC7.7 JP44.4
SPK+7: IC8.7 JP51.4
SPK+8: IC9.7 JP58.4
SPK+9: IC10.7 JP65.4
SPK+10: IC11.7 JP72.4
SPK+11: IC12.7 JP79.4
SPK+12: IC13.7 JP86.4
SPK+13: IC14.7 JP93.4
SPK+14: IC15.7 JP100.4
SPK-: IC1.8 JP2.3
SPK-1: IC2.8 JP9.3
SPK-2: IC3.8 JP16.3
SPK-3: IC4.8 JP23.3
SPK-4: IC5.8 JP30.3
SPK-5: IC6.8 JP37.3
SPK-6: IC7.8 JP44.3
SPK-7: IC8.8 JP51.3
SPK-8: IC9.8 JP58.3
SPK-9: IC10.8 JP65.3
SPK-10: IC11.8 JP72.3
SPK-11: IC12.8 JP79.3
SPK-12: IC13.8 JP86.3
SPK-13: IC14.8 JP93.3
SPK-14: IC15.8 JP100.3
VCC: JP1.2 JP3.2 U2.1 U2.3
VCC1: JP8.2 JP10.2 U4.1 U4.3
VCC2: JP15.2 JP17.2 U6.1 U6.3
VCC3: JP22.2 JP24.2 U8.1 U8.3
VCC4: JP29.2 JP31.2 U10.1 U10.3
VCC5: JP36.2 JP38.2 U12.1 U12.3
VCC6: JP43.2 JP45.2 U14.1 U14.3
VCC7: JP50.2 JP52.2 U16.1 U16.3
VCC8: JP57.2 JP59.2 U18.1 U18.3
VCC9: JP64.2 JP66.2 U20.1 U20.3
VCC10: JP71.2 JP73.2 U22.1 U22.3
VCC11: JP78.2 JP80.2 U24.1 U24.3
VCC12: JP85.2 JP87.2 U26.1 U26.3
VCC13: JP92.2 JP94.2 U28.1 U28.3
VCC14: JP99.2 JP101.2 U30.1 U30.3

## Tracks (layer width: path | path; a pad name or v marks a point on that pad's centre or on a via)
3.3V  (via drill 0.51)
  Top 0.254: 22.48,21.12 IC1.14 18.29,21.12 | 22.48,21.12 23.07,21.12 23.37,20.83 C1.1 | 22.48,21.12 22.48,17.91 22.75,17.64 R1.2 22.75,15.1 24.64,13.21 JP2.7 | 18.29,21.12 17.48,21.12 16.84,21.77 IC1.6 12.63,21.77 12.45,21.59 12.06,21.59 11.94,21.46 Q1.3 13.63,15.58 15.11,14.1 15.11,12.83 13.24,10.95 U2.5 | U1.4 17.73,38.41 18.29,37.85 v18.29,32.26 | v18.29,27.18 18.29,21.12
  Bottom 0.254: v18.29,32.26 18.29,29.46 18.8,28.96 18.8,27.69 v18.29,27.18
3.3V1  (via drill 0.51)
  Top 0.254: 43.31,21.12 IC2.14 39.12,21.12 | 43.31,21.12 43.9,21.12 44.2,20.83 C4.1 | 43.31,21.12 43.31,17.91 43.58,17.64 R3.2 43.58,15.1 45.47,13.21 JP9.7 | 39.12,21.12 38.31,21.12 37.66,21.77 IC2.6 33.46,21.77 33.27,21.59 32.89,21.59 32.77,21.46 Q2.3 34.46,15.58 35.94,14.1 35.94,12.83 34.07,10.95 U4.5 | U3.4 38.56,38.41 39.12,37.85 v39.12,32.26 | v39.12,27.18 39.12,21.12
  Bottom 0.254: v39.12,32.26 39.12,29.46 39.62,28.96 39.62,27.69 v39.12,27.18
3.3V2  (via drill 0.51)
  Top 0.254: 64.14,21.12 IC3.14 59.94,21.12 | 64.14,21.12 64.73,21.12 65.02,20.83 C7.1 | 64.14,21.12 64.14,17.91 64.4,17.64 R5.2 64.4,15.1 66.29,13.21 JP16.7 | 59.94,21.12 59.14,21.12 58.49,21.77 IC3.6 54.28,21.77 54.1,21.59 53.72,21.59 53.59,21.46 Q3.3 55.29,15.58 56.77,14.1 56.77,12.83 54.89,10.95 U6.5 | U5.4 59.38,38.41 59.94,37.85 v59.94,32.26 | v59.94,27.18 59.94,21.12
  Bottom 0.254: v59.94,32.26 59.94,29.46 60.45,28.96 60.45,27.69 v59.94,27.18
3.3V3  (via drill 0.51)
  Top 0.254: 84.96,21.12 IC4.14 80.77,21.12 | 84.96,21.12 85.56,21.12 85.85,20.83 C10.1 | 84.96,21.12 84.96,17.91 85.23,17.64 R7.2 85.23,15.1 87.12,13.21 JP23.7 | 80.77,21.12 79.97,21.12 79.32,21.77 IC4.6 75.11,21.77 74.93,21.59 74.55,21.59 74.42,21.46 Q4.3 76.12,15.58 77.6,14.1 77.6,12.83 75.72,10.95 U8.5 | U7.4 80.21,38.41 80.77,37.85 v80.77,32.26 | v80.77,27.18 80.77,21.12
  Bottom 0.254: v80.77,32.26 80.77,29.46 81.28,28.96 81.28,27.69 v80.77,27.18
3.3V4  (via drill 0.51)
  Top 0.254: 105.79,21.12 IC5.14 101.6,21.12 | 105.79,21.12 106.39,21.12 106.68,20.83 C13.1 | 105.79,21.12 105.79,17.91 106.06,17.64 R9.2 106.06,15.1 107.95,13.21 JP30.7 | 101.6,21.12 100.8,21.12 100.15,21.77 IC5.6 95.94,21.77 95.76,21.59 95.38,21.59 95.25,21.46 Q5.3 96.94,15.58 98.42,14.1 98.42,12.83 96.55,10.95 U10.5 | U9.4 101.04,38.41 101.6,37.85 v101.6,32.26 | v101.6,27.18 101.6,21.12
  Bottom 0.254: v101.6,32.26 101.6,29.46 102.11,28.96 102.11,27.69 v101.6,27.18
3.3V5  (via drill 0.51)
  Top 0.254: 22.48,64.3 IC6.14 18.29,64.3 | 22.48,64.3 23.07,64.3 23.37,64.01 C16.1 | 22.48,64.3 22.48,61.09 22.75,60.82 R11.2 22.75,58.28 24.64,56.39 JP37.7 | 18.29,64.3 17.48,64.3 16.84,64.95 IC6.6 12.63,64.95 12.45,64.77 12.06,64.77 11.94,64.64 Q6.3 13.63,58.76 15.11,57.28 15.11,56.01 13.24,54.13 U12.5 | U11.4 17.73,81.59 18.29,81.03 v18.29,75.44 | v18.29,70.36 18.29,64.3
  Bottom 0.254: v18.29,75.44 18.29,72.64 18.8,72.14 18.8,70.87 v18.29,70.36
3.3V6  (via drill 0.51)
  Top 0.254: 43.31,64.3 IC7.14 39.12,64.3 | 43.31,64.3 43.9,64.3 44.2,64.01 C19.1 | 43.31,64.3 43.31,61.09 43.58,60.82 R13.2 43.58,58.28 45.47,56.39 JP44.7 | 39.12,64.3 38.31,64.3 37.66,64.95 IC7.6 33.46,64.95 33.27,64.77 32.89,64.77 32.77,64.64 Q7.3 34.46,58.76 35.94,57.28 35.94,56.01 34.07,54.13 U14.5 | U13.4 38.56,81.59 39.12,81.03 v39.12,75.44 | v39.12,70.36 39.12,64.3
  Bottom 0.254: v39.12,75.44 39.12,72.64 39.62,72.14 39.62,70.87 v39.12,70.36
3.3V7  (via drill 0.51)
  Top 0.254: 64.14,64.3 IC8.14 59.94,64.3 | 64.14,64.3 64.73,64.3 65.02,64.01 C22.1 | 64.14,64.3 64.14,61.09 64.4,60.82 R15.2 64.4,58.28 66.29,56.39 JP51.7 | 59.94,64.3 59.14,64.3 58.49,64.95 IC8.6 54.28,64.95 54.1,64.77 53.72,64.77 53.59,64.64 Q8.3 55.29,58.76 56.77,57.28 56.77,56.01 54.89,54.13 U16.5 | U15.4 59.38,81.59 59.94,81.03 v59.94,75.44 | v59.94,70.36 59.94,64.3
  Bottom 0.254: v59.94,75.44 59.94,72.64 60.45,72.14 60.45,70.87 v59.94,70.36
3.3V8  (via drill 0.51)
  Top 0.254: 84.96,64.3 IC9.14 80.77,64.3 | 84.96,64.3 85.56,64.3 85.85,64.01 C25.1 | 84.96,64.3 84.96,61.09 85.23,60.82 R17.2 85.23,58.28 87.12,56.39 JP58.7 | 80.77,64.3 79.97,64.3 79.32,64.95 IC9.6 75.11,64.95 74.93,64.77 74.55,64.77 74.42,64.64 Q9.3 76.12,58.76 77.6,57.28 77.6,56.01 75.72,54.13 U18.5 | U17.4 80.21,81.59 80.77,81.03 v80.77,75.44 | v80.77,70.36 80.77,64.3
  Bottom 0.254: v80.77,75.44 80.77,72.64 81.28,72.14 81.28,70.87 v80.77,70.36
3.3V9  (via drill 0.51)
  Top 0.254: 105.79,64.3 IC10.14 101.6,64.3 | 105.79,64.3 106.39,64.3 106.68,64.01 C28.1 | 105.79,64.3 105.79,61.09 106.06,60.82 R19.2 106.06,58.28 107.95,56.39 JP65.7 | 101.6,64.3 100.8,64.3 100.15,64.95 IC10.6 95.94,64.95 95.76,64.77 95.38,64.77 95.25,64.64 Q10.3 96.94,58.76 98.42,57.28 98.42,56.01 96.55,54.13 U20.5 | U19.4 101.04,81.59 101.6,81.03 v101.6,75.44 | v101.6,70.36 101.6,64.3
  Bottom 0.254: v101.6,75.44 101.6,72.64 102.11,72.14 102.11,70.87 v101.6,70.36
3.3V10  (via drill 0.51)
  Top 0.254: 22.48,107.48 IC11.14 18.29,107.48 | 22.48,107.48 23.07,107.48 23.37,107.19 C31.1 | 22.48,107.48 22.48,104.27 22.75,104 R21.2 22.75,101.46 24.64,99.57 JP72.7 | 18.29,107.48 17.48,107.48 16.84,108.13 IC11.6 12.63,108.13 12.45,107.95 12.06,107.95 11.94,107.82 Q11.3 13.63,101.94 15.11,100.46 15.11,99.19 13.24,97.31 U22.5 | U21.4 17.73,124.77 18.29,124.21 v18.29,118.62 | v18.29,113.54 18.29,107.48
  Bottom 0.254: v18.29,118.62 18.29,115.82 18.8,115.32 18.8,114.05 v18.29,113.54
3.3V11  (via drill 0.51)
  Top 0.254: 43.31,107.48 IC12.14 39.12,107.48 | 43.31,107.48 43.9,107.48 44.2,107.19 C34.1 | 43.31,107.48 43.31,104.27 43.58,104 R23.2 43.58,101.46 45.47,99.57 JP79.7 | 39.12,107.48 38.31,107.48 37.66,108.13 IC12.6 33.46,108.13 33.27,107.95 32.89,107.95 32.77,107.82 Q12.3 34.46,101.94 35.94,100.46 35.94,99.19 34.07,97.31 U24.5 | U23.4 38.56,124.77 39.12,124.21 v39.12,118.62 | v39.12,113.54 39.12,107.48
  Bottom 0.254: v39.12,118.62 39.12,115.82 39.62,115.32 39.62,114.05 v39.12,113.54
3.3V12  (via drill 0.51)
  Top 0.254: 64.14,107.48 IC13.14 59.94,107.48 | 64.14,107.48 64.73,107.48 65.02,107.19 C37.1 | 64.14,107.48 64.14,104.27 64.4,104 R25.2 64.4,101.46 66.29,99.57 JP86.7 | 59.94,107.48 59.14,107.48 58.49,108.13 IC13.6 54.28,108.13 54.1,107.95 53.72,107.95 53.59,107.82 Q13.3 55.29,101.94 56.77,100.46 56.77,99.19 54.89,97.31 U26.5 | U25.4 59.38,124.77 59.94,124.21 v59.94,118.62 | v59.94,113.54 59.94,107.48
  Bottom 0.254: v59.94,118.62 59.94,115.82 60.45,115.32 60.45,114.05 v59.94,113.54
3.3V13  (via drill 0.51)
  Top 0.254: 84.96,107.48 IC14.14 80.77,107.48 | 84.96,107.48 85.56,107.48 85.85,107.19 C40.1 | 84.96,107.48 84.96,104.27 85.23,104 R27.2 85.23,101.46 87.12,99.57 JP93.7 | 80.77,107.48 79.97,107.48 79.32,108.13 IC14.6 75.11,108.13 74.93,107.95 74.55,107.95 74.42,107.82 Q14.3 76.12,101.94 77.6,100.46 77.6,99.19 75.72,97.31 U28.5 | U27.4 80.21,124.77 80.77,124.21 v80.77,118.62 | v80.77,113.54 80.77,107.48
  Bottom 0.254: v80.77,118.62 80.77,115.82 81.28,115.32 81.28,114.05 v80.77,113.54
3.3V14  (via drill 0.51)
  Top 0.254: 105.79,107.48 IC15.14 101.6,107.48 | 105.79,107.48 106.39,107.48 106.68,107.19 C43.1 | 105.79,107.48 105.79,104.27 106.06,104 R29.2 106.06,101.46 107.95,99.57 JP100.7 | 101.6,107.48 100.8,107.48 100.15,108.13 IC15.6 95.94,108.13 95.76,107.95 95.38,107.95 95.25,107.82 Q15.3 96.94,101.94 98.42,100.46 98.42,99.19 96.55,97.31 U30.5 | U29.4 101.04,124.77 101.6,124.21 v101.6,118.62 | v101.6,113.54 101.6,107.48
  Bottom 0.254: v101.6,118.62 101.6,115.82 102.11,115.32 102.11,114.05 v101.6,113.54
BUSY
  Top 0.254: IC1.4 12.28,23.07 11.94,22.73 11.05,22.73 9.65,21.34 9.65,19.81 JP1.5
BUSY1
  Top 0.254: IC2.4 33.11,23.07 32.77,22.73 31.88,22.73 30.48,21.34 30.48,19.81 JP8.5
BUSY2
  Top 0.254: IC3.4 53.93,23.07 53.59,22.73 52.7,22.73 51.31,21.34 51.31,19.81 JP15.5
BUSY3
  Top 0.254: IC4.4 74.76,23.07 74.42,22.73 73.53,22.73 72.14,21.34 72.14,19.81 JP22.5
BUSY4
  Top 0.254: IC5.4 95.59,23.07 95.25,22.73 94.36,22.73 92.96,21.34 92.96,19.81 JP29.5
BUSY5
  Top 0.254: IC6.4 12.28,66.25 11.94,65.91 11.05,65.91 9.65,64.52 9.65,62.99 JP36.5
BUSY6
  Top 0.254: IC7.4 33.11,66.25 32.77,65.91 31.88,65.91 30.48,64.52 30.48,62.99 JP43.5
BUSY7
  Top 0.254: IC8.4 53.93,66.25 53.59,65.91 52.7,65.91 51.31,64.52 51.31,62.99 JP50.5
BUSY8
  Top 0.254: IC9.4 74.76,66.25 74.42,65.91 73.53,65.91 72.14,64.52 72.14,62.99 JP57.5
BUSY9
  Top 0.254: IC10.4 95.59,66.25 95.25,65.91 94.36,65.91 92.96,64.52 92.96,62.99 JP64.5
BUSY10
  Top 0.254: IC11.4 12.28,109.43 11.94,109.09 11.05,109.09 9.65,107.7 9.65,106.17 JP71.5
BUSY11
  Top 0.254: IC12.4 33.11,109.43 32.77,109.09 31.88,109.09 30.48,107.7 30.48,106.17 JP78.5
BUSY12
  Top 0.254: IC13.4 53.93,109.43 53.59,109.09 52.7,109.09 51.31,107.7 51.31,106.17 JP85.5
BUSY13
  Top 0.254: IC14.4 74.76,109.43 74.42,109.09 73.53,109.09 72.14,107.7 72.14,106.17 JP92.5
BUSY14
  Top 0.254: IC15.4 95.59,109.43 95.25,109.09 94.36,109.09 92.96,107.7 92.96,106.17 JP99.5
DCLK
  Top 0.254: IC1.2 11.67,24.37 11.3,24 10.03,24 9.4,23.37 JP1.3
DCLK1
  Top 0.254: IC2.2 32.5,24.37 32.13,24 30.86,24 30.23,23.37 JP8.3
DCLK2
  Top 0.254: IC3.2 53.33,24.37 52.96,24 51.69,24 51.05,23.37 JP15.3
DCLK3
  Top 0.254: IC4.2 74.16,24.37 73.79,24 72.52,24 71.88,23.37 JP22.3
DCLK4
  Top 0.254: IC5.2 94.98,24.37 94.61,24 93.34,24 92.71,23.37 JP29.3
DCLK5
  Top 0.254: IC6.2 11.67,67.55 11.3,67.18 10.03,67.18 9.4,66.55 JP36.3
DCLK6
  Top 0.254: IC7.2 32.5,67.55 32.13,67.18 30.86,67.18 30.23,66.55 JP43.3
DCLK7
  Top 0.254: IC8.2 53.33,67.55 52.96,67.18 51.69,67.18 51.05,66.55 JP50.3
DCLK8
  Top 0.254: IC9.2 74.16,67.55 73.79,67.18 72.52,67.18 71.88,66.55 JP57.3
DCLK9
  Top 0.254: IC10.2 94.98,67.55 94.61,67.18 93.34,67.18 92.71,66.55 JP64.3
DCLK10
  Top 0.254: IC11.2 11.67,110.73 11.3,110.36 10.03,110.36 9.4,109.73 JP71.3
DCLK11
  Top 0.254: IC12.2 32.5,110.73 32.13,110.36 30.86,110.36 30.23,109.73 JP78.3
DCLK12
  Top 0.254: IC13.2 53.33,110.73 52.96,110.36 51.69,110.36 51.05,109.73 JP85.3
DCLK13
  Top 0.254: IC14.2 74.16,110.73 73.79,110.36 72.52,110.36 71.88,109.73 JP92.3
DCLK14
  Top 0.254: IC15.2 94.98,110.73 94.61,110.36 93.34,110.36 92.71,109.73 JP99.3
DIN
  Top 0.254: IC1.3 12.04,23.72 11.68,23.37 10.67,23.37 JP1.4
DIN1
  Top 0.254: IC2.3 32.87,23.72 32.51,23.37 31.5,23.37 JP8.4
DIN2
  Top 0.254: IC3.3 53.7,23.72 53.34,23.37 52.32,23.37 JP15.4
DIN3
  Top 0.254: IC4.3 74.52,23.72 74.17,23.37 73.15,23.37 JP22.4
DIN4
  Top 0.254: IC5.3 95.35,23.72 95,23.37 93.98,23.37 JP29.4
DIN5
  Top 0.254: IC6.3 12.04,66.9 11.68,66.55 10.67,66.55 JP36.4
DIN6
  Top 0.254: IC7.3 32.87,66.9 32.51,66.55 31.5,66.55 JP43.4
DIN7
  Top 0.254: IC8.3 53.7,66.9 53.34,66.55 52.32,66.55 JP50.4
DIN8
  Top 0.254: IC9.3 74.52,66.9 74.17,66.55 73.15,66.55 JP57.4
DIN9
  Top 0.254: IC10.3 95.35,66.9 95,66.55 93.98,66.55 JP64.4
DIN10
  Top 0.254: IC11.3 12.04,110.08 11.68,109.73 10.67,109.73 JP71.4
DIN11
  Top 0.254: IC12.3 32.87,110.08 32.51,109.73 31.5,109.73 JP78.4
DIN12
  Top 0.254: IC13.3 53.7,110.08 53.34,109.73 52.32,109.73 JP85.4
DIN13
  Top 0.254: IC14.3 74.52,110.08 74.17,109.73 73.15,109.73 JP92.4
DIN14
  Top 0.254: IC15.3 95.35,110.08 95,109.73 93.98,109.73 JP99.4
GND  (via drill 0.51)
  Top 0.254: Q1.1 10.99,12.24 C2.1 9.91,11.94 9.4,11.43 9.4,9.91 9.91,9.4 U2.2 | JP2.6 24.38,15.75 23.75,16.38 23.75,17.91 23.37,18.29 C1.2
  other vias: 23.37,37.34 20.83,32.26 13.21,34.8 8.13,10.67 19.68,20.19 19.56,17.78 23.88,17.65
  pour Bottom (isolate 0.305): 6.86,46.23 27.18,46.23 27.18,6.86 6.86,6.86
  pour Top (isolate 0.305): 6.86,46.23 27.18,46.23 27.18,6.86 6.86,6.86
GND1  (via drill 0.51)
  Top 0.254: Q2.1 31.82,12.24 C6.1 30.73,11.94 30.23,11.43 30.23,9.91 30.73,9.4 U4.2 | JP9.6 45.21,15.75 44.58,16.38 44.58,17.91 44.2,18.29 C4.2
  other vias: 44.2,37.34 41.66,32.26 34.04,34.8 28.96,10.67 40.51,20.19 40.39,17.78 44.7,17.65
  pour Bottom (isolate 0.305): 27.69,46.23 48.01,46.23 48.01,6.86 27.69,6.86
  pour Top (isolate 0.305): 27.69,46.23 48.01,46.23 48.01,6.86 27.69,6.86
GND2  (via drill 0.51)
  Top 0.254: Q3.1 52.64,12.24 C9.1 51.56,11.94 51.05,11.43 51.05,9.91 51.56,9.4 U6.2 | JP16.6 66.04,15.75 65.41,16.38 65.41,17.91 65.02,18.29 C7.2
  other vias: 65.02,37.34 62.48,32.26 54.86,34.8 49.78,10.67 61.34,20.19 61.21,17.78 65.53,17.65
  pour Bottom (isolate 0.305): 48.51,46.23 68.83,46.23 68.83,6.86 48.51,6.86
  pour Top (isolate 0.305): 48.51,46.23 68.83,46.23 68.83,6.86 48.51,6.86
GND3  (via drill 0.51)
  Top 0.254: Q4.1 73.47,12.24 C12.1 72.39,11.94 71.88,11.43 71.88,9.91 72.39,9.4 U8.2 | JP23.6 86.87,15.75 86.23,16.38 86.23,17.91 85.85,18.29 C10.2
  other vias: 85.85,37.34 83.31,32.26 75.69,34.8 70.61,10.67 82.17,20.19 82.04,17.78 86.36,17.65
  pour Bottom (isolate 0.305): 69.34,46.23 89.66,46.23 89.66,6.86 69.34,6.86
  pour Top (isolate 0.305): 69.34,46.23 89.66,46.23 89.66,6.86 69.34,6.86
GND4  (via drill 0.51)
  Top 0.254: Q5.1 94.3,12.24 C15.1 93.22,11.94 92.71,11.43 92.71,9.91 93.22,9.4 U10.2 | JP30.6 107.7,15.75 107.06,16.38 107.06,17.91 106.68,18.29 C13.2
  other vias: 106.68,37.34 104.14,32.26 96.52,34.8 91.44,10.67 103,20.19 102.87,17.78 107.19,17.65
  pour Bottom (isolate 0.305): 90.17,46.23 110.49,46.23 110.49,6.86 90.17,6.86
  pour Top (isolate 0.305): 90.17,46.23 110.49,46.23 110.49,6.86 90.17,6.86
GND5  (via drill 0.51)
  Top 0.254: Q6.1 10.99,55.42 C18.1 9.91,55.12 9.4,54.61 9.4,53.09 9.91,52.58 U12.2 | JP37.6 24.38,58.93 23.75,59.56 23.75,61.09 23.37,61.47 C16.2
  other vias: 23.37,80.52 20.83,75.44 13.21,77.98 8.13,53.85 19.68,63.37 19.56,60.96 23.88,60.83
  pour Bottom (isolate 0.305): 6.86,89.41 27.18,89.41 27.18,50.04 6.86,50.04
  pour Top (isolate 0.305): 6.86,89.41 27.18,89.41 27.18,50.04 6.86,50.04
GND6  (via drill 0.51)
  Top 0.254: Q7.1 31.82,55.42 C21.1 30.73,55.12 30.23,54.61 30.23,53.09 30.73,52.58 U14.2 | JP44.6 45.21,58.93 44.58,59.56 44.58,61.09 44.2,61.47 C19.2
  other vias: 44.2,80.52 41.66,75.44 34.04,77.98 28.96,53.85 40.51,63.37 40.39,60.96 44.7,60.83
  pour Bottom (isolate 0.305): 27.69,89.41 48.01,89.41 48.01,50.04 27.69,50.04
  pour Top (isolate 0.305): 27.69,89.41 48.01,89.41 48.01,50.04 27.69,50.04
GND7  (via drill 0.51)
  Top 0.254: Q8.1 52.64,55.42 C24.1 51.56,55.12 51.05,54.61 51.05,53.09 51.56,52.58 U16.2 | JP51.6 66.04,58.93 65.41,59.56 65.41,61.09 65.02,61.47 C22.2
  other vias: 65.02,80.52 62.48,75.44 54.86,77.98 49.78,53.85 61.34,63.37 61.21,60.96 65.53,60.83
  pour Bottom (isolate 0.305): 48.51,89.41 68.83,89.41 68.83,50.04 48.51,50.04
  pour Top (isolate 0.305): 48.51,89.41 68.83,89.41 68.83,50.04 48.51,50.04
GND8  (via drill 0.51)
  Top 0.254: Q9.1 73.47,55.42 C27.1 72.39,55.12 71.88,54.61 71.88,53.09 72.39,52.58 U18.2 | JP58.6 86.87,58.93 86.23,59.56 86.23,61.09 85.85,61.47 C25.2
  other vias: 85.85,80.52 83.31,75.44 75.69,77.98 70.61,53.85 82.17,63.37 82.04,60.96 86.36,60.83
  pour Bottom (isolate 0.305): 69.34,89.41 89.66,89.41 89.66,50.04 69.34,50.04
  pour Top (isolate 0.305): 69.34,89.41 89.66,89.41 89.66,50.04 69.34,50.04
GND9  (via drill 0.51)
  Top 0.254: Q10.1 94.3,55.42 C30.1 93.22,55.12 92.71,54.61 92.71,53.09 93.22,52.58 U20.2 | JP65.6 107.7,58.93 107.06,59.56 107.06,61.09 106.68,61.47 C28.2
  other vias: 106.68,80.52 104.14,75.44 96.52,77.98 91.44,53.85 103,63.37 102.87,60.96 107.19,60.83
  pour Bottom (isolate 0.305): 90.17,89.41 110.49,89.41 110.49,50.04 90.17,50.04
  pour Top (isolate 0.305): 90.17,89.41 110.49,89.41 110.49,50.04 90.17,50.04
GND10  (via drill 0.51)
  Top 0.254: Q11.1 10.99,98.6 C33.1 9.91,98.3 9.4,97.79 9.4,96.27 9.91,95.76 U22.2 | JP72.6 24.38,102.11 23.75,102.74 23.75,104.27 23.37,104.65 C31.2
  other vias: 23.37,123.7 20.83,118.62 13.21,121.16 8.13,97.03 19.68,106.55 19.56,104.14 23.88,104.01
  pour Bottom (isolate 0.305): 6.86,132.59 27.18,132.59 27.18,93.22 6.86,93.22
  pour Top (isolate 0.305): 6.86,132.59 27.18,132.59 27.18,93.22 6.86,93.22
GND11  (via drill 0.51)
  Top 0.254: Q12.1 31.82,98.6 C36.1 30.73,98.3 30.23,97.79 30.23,96.27 30.73,95.76 U24.2 | JP79.6 45.21,102.11 44.58,102.74 44.58,104.27 44.2,104.65 C34.2
  other vias: 44.2,123.7 41.66,118.62 34.04,121.16 28.96,97.03 40.51,106.55 40.39,104.14 44.7,104.01
  pour Bottom (isolate 0.305): 27.69,132.59 48.01,132.59 48.01,93.22 27.69,93.22
  pour Top (isolate 0.305): 27.69,132.59 48.01,132.59 48.01,93.22 27.69,93.22
GND12  (via drill 0.51)
  Top 0.254: Q13.1 52.64,98.6 C39.1 51.56,98.3 51.05,97.79 51.05,96.27 51.56,95.76 U26.2 | JP86.6 66.04,102.11 65.41,102.74 65.41,104.27 65.02,104.65 C37.2
  other vias: 65.02,123.7 62.48,118.62 54.86,121.16 49.78,97.03 61.34,106.55 61.21,104.14 65.53,104.01
  pour Bottom (isolate 0.305): 48.51,132.59 68.83,132.59 68.83,93.22 48.51,93.22
  pour Top (isolate 0.305): 48.51,132.59 68.83,132.59 68.83,93.22 48.51,93.22
GND13  (via drill 0.51)
  Top 0.254: Q14.1 73.47,98.6 C42.1 72.39,98.3 71.88,97.79 71.88,96.27 72.39,95.76 U28.2 | JP93.6 86.87,102.11 86.23,102.74 86.23,104.27 85.85,104.65 C40.2
  other vias: 85.85,123.7 83.31,118.62 75.69,121.16 70.61,97.03 82.17,106.55 82.04,104.14 86.36,104.01
  pour Bottom (isolate 0.305): 69.34,132.59 89.66,132.59 89.66,93.22 69.34,93.22
  pour Top (isolate 0.305): 69.34,132.59 89.66,132.59 89.66,93.22 69.34,93.22
GND14  (via drill 0.51)
  Top 0.254: Q15.1 94.3,98.6 C45.1 93.22,98.3 92.71,97.79 92.71,96.27 93.22,95.76 U30.2 | JP100.6 107.7,102.11 107.06,102.74 107.06,104.27 106.68,104.65 C43.2
  other vias: 106.68,123.7 104.14,118.62 96.52,121.16 91.44,97.03 103,106.55 102.87,104.14 107.19,104.01
  pour Bottom (isolate 0.305): 90.17,132.59 110.49,132.59 110.49,93.22 90.17,93.22
  pour Top (isolate 0.305): 90.17,132.59 110.49,132.59 110.49,93.22 90.17,93.22
N$1
  Top 0.254: IC1.13 21.69,20.47 21.97,20.19 21.97,18.54 21.45,18.02 R1.1
N$2  (via drill 0.51)
  Top 0.254: IC1.11 18.41,19.17 v18.16,18.92 | R2.2 C3.1 16.4,22.88 v16.38,22.86
  Bottom 0.254: v18.16,18.92 17.78,18.54 16.76,18.54 16.13,19.18 16.13,22.48 16.38,22.73 v16.38,22.86
N$3
  Top 0.254: IC2.13 42.52,20.47 42.8,20.19 42.8,18.54 42.28,18.02 R3.1
N$4  (via drill 0.51)
  Top 0.254: IC2.11 39.24,19.17 v38.99,18.92 | R4.2 C5.1 37.23,22.88 v37.21,22.86
  Bottom 0.254: v38.99,18.92 38.61,18.54 37.59,18.54 36.96,19.18 36.96,22.48 37.21,22.73 v37.21,22.86
N$5
  Top 0.254: IC3.13 63.35,20.47 63.63,20.19 63.63,18.54 63.1,18.02 R5.1
N$6  (via drill 0.51)
  Top 0.254: IC3.11 60.07,19.17 v59.82,18.92 | R6.2 C8.1 58.05,22.88 v58.04,22.86
  Bottom 0.254: v59.82,18.92 59.44,18.54 58.42,18.54 57.78,19.18 57.78,22.48 58.04,22.73 v58.04,22.86
N$7
  Top 0.254: IC4.13 84.17,20.47 84.45,20.19 84.45,18.54 83.93,18.02 R7.1
N$8  (via drill 0.51)
  Top 0.254: IC4.11 80.89,19.17 v80.64,18.92 | R8.2 C11.1 78.88,22.88 v78.87,22.86
  Bottom 0.254: v80.64,18.92 80.26,18.54 79.25,18.54 78.61,19.18 78.61,22.48 78.87,22.73 v78.87,22.86
N$9
  Top 0.254: IC5.13 105,20.47 105.28,20.19 105.28,18.54 104.76,18.02 R9.1
N$10  (via drill 0.51)
  Top 0.254: IC5.11 101.72,19.17 v101.47,18.92 | R10.2 C14.1 99.71,22.88 v99.69,22.86
  Bottom 0.254: v101.47,18.92 101.09,18.54 100.08,18.54 99.44,19.18 99.44,22.48 99.69,22.73 v99.69,22.86
N$11
  Top 0.254: IC6.13 21.69,63.65 21.97,63.37 21.97,61.72 21.45,61.2 R11.1
N$12  (via drill 0.51)
  Top 0.254: IC6.11 18.41,62.35 v18.16,62.1 | R12.2 C17.1 16.4,66.06 v16.38,66.04
  Bottom 0.254: v18.16,62.1 17.78,61.72 16.76,61.72 16.13,62.36 16.13,65.66 16.38,65.91 v16.38,66.04
N$13
  Top 0.254: IC7.13 42.52,63.65 42.8,63.37 42.8,61.72 42.28,61.2 R13.1
N$14  (via drill 0.51)
  Top 0.254: IC7.11 39.24,62.35 v38.99,62.1 | R14.2 C20.1 37.23,66.06 v37.21,66.04
  Bottom 0.254: v38.99,62.1 38.61,61.72 37.59,61.72 36.96,62.36 36.96,65.66 37.21,65.91 v37.21,66.04
N$15
  Top 0.254: IC8.13 63.35,63.65 63.63,63.37 63.63,61.72 63.1,61.2 R15.1
N$16  (via drill 0.51)
  Top 0.254: IC8.11 60.07,62.35 v59.82,62.1 | R16.2 C23.1 58.05,66.06 v58.04,66.04
  Bottom 0.254: v59.82,62.1 59.44,61.72 58.42,61.72 57.78,62.36 57.78,65.66 58.04,65.91 v58.04,66.04
N$17
  Top 0.254: IC9.13 84.17,63.65 84.45,63.37 84.45,61.72 83.93,61.2 R17.1
N$18  (via drill 0.51)
  Top 0.254: IC9.11 80.89,62.35 v80.64,62.1 | R18.2 C26.1 78.88,66.06 v78.87,66.04
  Bottom 0.254: v80.64,62.1 80.26,61.72 79.25,61.72 78.61,62.36 78.61,65.66 78.87,65.91 v78.87,66.04
N$19
  Top 0.254: IC10.13 105,63.65 105.28,63.37 105.28,61.72 104.76,61.2 R19.1
N$20  (via drill 0.51)
  Top 0.254: IC10.11 101.72,62.35 v101.47,62.1 | R20.2 C29.1 99.71,66.06 v99.69,66.04
  Bottom 0.254: v101.47,62.1 101.09,61.72 100.08,61.72 99.44,62.36 99.44,65.66 99.69,65.91 v99.69,66.04
N$21
  Top 0.254: IC11.13 21.69,106.83 21.97,106.55 21.97,104.9 21.45,104.38 R21.1
N$22  (via drill 0.51)
  Top 0.254: IC11.11 18.41,105.53 v18.16,105.28 | R22.2 C32.1 16.4,109.23 v16.38,109.22
  Bottom 0.254: v18.16,105.28 17.78,104.9 16.76,104.9 16.13,105.54 16.13,108.84 16.38,109.09 v16.38,109.22
N$23
  Top 0.254: IC12.13 42.52,106.83 42.8,106.55 42.8,104.9 42.28,104.38 R23.1
N$24  (via drill 0.51)
  Top 0.254: IC12.11 39.24,105.53 v38.99,105.28 | R24.2 C35.1 37.23,109.23 v37.21,109.22
  Bottom 0.254: v38.99,105.28 38.61,104.9 37.59,104.9 36.96,105.54 36.96,108.84 37.21,109.09 v37.21,109.22
N$25
  Top 0.254: IC13.13 63.35,106.83 63.63,106.55 63.63,104.9 63.1,104.38 R25.1
N$26  (via drill 0.51)
  Top 0.254: IC13.11 60.07,105.53 v59.82,105.28 | R26.2 C38.1 58.05,109.23 v58.04,109.22
  Bottom 0.254: v59.82,105.28 59.44,104.9 58.42,104.9 57.78,105.54 57.78,108.84 58.04,109.09 v58.04,109.22
N$27
  Top 0.254: IC14.13 84.17,106.83 84.45,106.55 84.45,104.9 83.93,104.38 R27.1
N$28  (via drill 0.51)
  Top 0.254: IC14.11 80.89,105.53 v80.64,105.28 | R28.2 C41.1 78.88,109.23 v78.87,109.22
  Bottom 0.254: v80.64,105.28 80.26,104.9 79.25,104.9 78.61,105.54 78.61,108.84 78.87,109.09 v78.87,109.22
N$29
  Top 0.254: IC15.13 105,106.83 105.28,106.55 105.28,104.9 104.76,104.38 R29.1
N$30  (via drill 0.51)
  Top 0.254: IC15.11 101.72,105.53 v101.47,105.28 | R30.2 C44.1 99.71,109.23 v99.69,109.22
  Bottom 0.254: v101.47,105.28 101.09,104.9 100.08,104.9 99.44,105.54 99.44,108.84 99.69,109.09 v99.69,109.22
NEXT  (via drill 0.51)
  Top 0.254: IC1.20 20.92,26.12 v20.95,26.16 | v10.67,15.75 JP1.7
  Bottom 0.254: v20.95,26.16 10.54,26.16 10.16,25.78 10.16,16.26 v10.67,15.75
NEXT1  (via drill 0.51)
  Top 0.254: IC2.20 41.75,26.12 v41.78,26.16 | v31.5,15.75 JP8.7
  Bottom 0.254: v41.78,26.16 31.37,26.16 30.99,25.78 30.99,16.26 v31.5,15.75
NEXT2  (via drill 0.51)
  Top 0.254: IC3.20 62.57,26.12 v62.61,26.16 | v52.32,15.75 JP15.7
  Bottom 0.254: v62.61,26.16 52.2,26.16 51.82,25.78 51.82,16.26 v52.32,15.75
NEXT3  (via drill 0.51)
  Top 0.254: IC4.20 83.4,26.12 v83.44,26.16 | v73.15,15.75 JP22.7
  Bottom 0.254: v83.44,26.16 73.03,26.16 72.64,25.78 72.64,16.26 v73.15,15.75
NEXT4  (via drill 0.51)
  Top 0.254: IC5.20 104.23,26.12 v104.27,26.16 | v93.98,15.75 JP29.7
  Bottom 0.254: v104.27,26.16 93.85,26.16 93.47,25.78 93.47,16.26 v93.98,15.75
NEXT5  (via drill 0.51)
  Top 0.254: IC6.20 20.92,69.31 v20.95,69.34 | v10.67,58.93 JP36.7
  Bottom 0.254: v20.95,69.34 10.54,69.34 10.16,68.96 10.16,59.44 v10.67,58.93
NEXT6  (via drill 0.51)
  Top 0.254: IC7.20 41.75,69.31 v41.78,69.34 | v31.5,58.93 JP43.7
  Bottom 0.254: v41.78,69.34 31.37,69.34 30.99,68.96 30.99,59.44 v31.5,58.93
NEXT7  (via drill 0.51)
  Top 0.254: IC8.20 62.57,69.31 v62.61,69.34 | v52.32,58.93 JP50.7
  Bottom 0.254: v62.61,69.34 52.2,69.34 51.82,68.96 51.82,59.44 v52.32,58.93
NEXT8  (via drill 0.51)
  Top 0.254: IC9.20 83.4,69.31 v83.44,69.34 | v73.15,58.93 JP57.7
  Bottom 0.254: v83.44,69.34 73.03,69.34 72.64,68.96 72.64,59.44 v73.15,58.93
NEXT9  (via drill 0.51)
  Top 0.254: IC10.20 104.23,69.31 v104.27,69.34 | v93.98,58.93 JP64.7
  Bottom 0.254: v104.27,69.34 93.85,69.34 93.47,68.96 93.47,59.44 v93.98,58.93
NEXT10  (via drill 0.51)
  Top 0.254: IC11.20 20.92,112.48 v20.95,112.52 | v10.67,102.11 JP71.7
  Bottom 0.254: v20.95,112.52 10.54,112.52 10.16,112.14 10.16,102.62 v10.67,102.11
NEXT11  (via drill 0.51)
  Top 0.254: IC12.20 41.75,112.48 v41.78,112.52 | v31.5,102.11 JP78.7
  Bottom 0.254: v41.78,112.52 31.37,112.52 30.99,112.14 30.99,102.62 v31.5,102.11
NEXT12  (via drill 0.51)
  Top 0.254: IC13.20 62.57,112.48 v62.61,112.52 | v52.32,102.11 JP85.7
  Bottom 0.254: v62.61,112.52 52.2,112.52 51.82,112.14 51.82,102.62 v52.32,102.11
NEXT13  (via drill 0.51)
  Top 0.254: IC14.20 83.4,112.48 v83.44,112.52 | v73.15,102.11 JP92.7
  Bottom 0.254: v83.44,112.52 73.03,112.52 72.64,112.14 72.64,102.62 v73.15,102.11
NEXT14  (via drill 0.51)
  Top 0.254: IC15.20 104.23,112.48 v104.27,112.52 | v93.98,102.11 JP99.7
  Bottom 0.254: v104.27,112.52 93.85,112.52 93.47,112.14 93.47,102.62 v93.98,102.11
PLAY
  Top 0.254: IC1.5 12.52,22.42 12.19,22.1 11.43,22.1 10.29,20.95 10.29,17.91 JP1.6
PLAY1
  Top 0.254: IC2.5 33.34,22.42 33.02,22.1 32.26,22.1 31.11,20.95 31.11,17.91 JP8.6
PLAY2
  Top 0.254: IC3.5 54.17,22.42 53.85,22.1 53.09,22.1 51.94,20.95 51.94,17.91 JP15.6
PLAY3
  Top 0.254: IC4.5 75,22.42 74.68,22.1 73.91,22.1 72.77,20.95 72.77,17.91 JP22.6
PLAY4
  Top 0.254: IC5.5 95.83,22.42 95.5,22.1 94.74,22.1 93.6,20.95 93.6,17.91 JP29.6
PLAY5
  Top 0.254: IC6.5 12.52,65.6 12.19,65.28 11.43,65.28 10.29,64.14 10.29,61.09 JP36.6
PLAY6
  Top 0.254: IC7.5 33.34,65.6 33.02,65.28 32.26,65.28 31.11,64.14 31.11,61.09 JP43.6
PLAY7
  Top 0.254: IC8.5 54.17,65.6 53.85,65.28 53.09,65.28 51.94,64.14 51.94,61.09 JP50.6
PLAY8
  Top 0.254: IC9.5 75,65.6 74.68,65.28 73.91,65.28 72.77,64.14 72.77,61.09 JP57.6
PLAY9
  Top 0.254: IC10.5 95.83,65.6 95.5,65.28 94.74,65.28 93.6,64.14 93.6,61.09 JP64.6
PLAY10
  Top 0.254: IC11.5 12.52,108.78 12.19,108.46 11.43,108.46 10.29,107.31 10.29,104.27 JP71.6
PLAY11
  Top 0.254: IC12.5 33.34,108.78 33.02,108.46 32.26,108.46 31.11,107.31 31.11,104.27 JP78.6
PLAY12
  Top 0.254: IC13.5 54.17,108.78 53.85,108.46 53.09,108.46 51.94,107.31 51.94,104.27 JP85.6
PLAY13
  Top 0.254: IC14.5 75,108.78 74.68,108.46 73.91,108.46 72.77,107.31 72.77,104.27 JP92.6
PLAY14
  Top 0.254: IC15.5 95.83,108.78 95.5,108.46 94.74,108.46 93.6,107.31 93.6,104.27 JP99.6
PREV
  Top 0.254: IC1.1 13.12,28.16 12.83,28.45 JP1.1
PREV1
  Top 0.254: IC2.1 33.95,28.16 33.66,28.45 JP8.1
PREV2